# Allegro board eem2ttl.brd
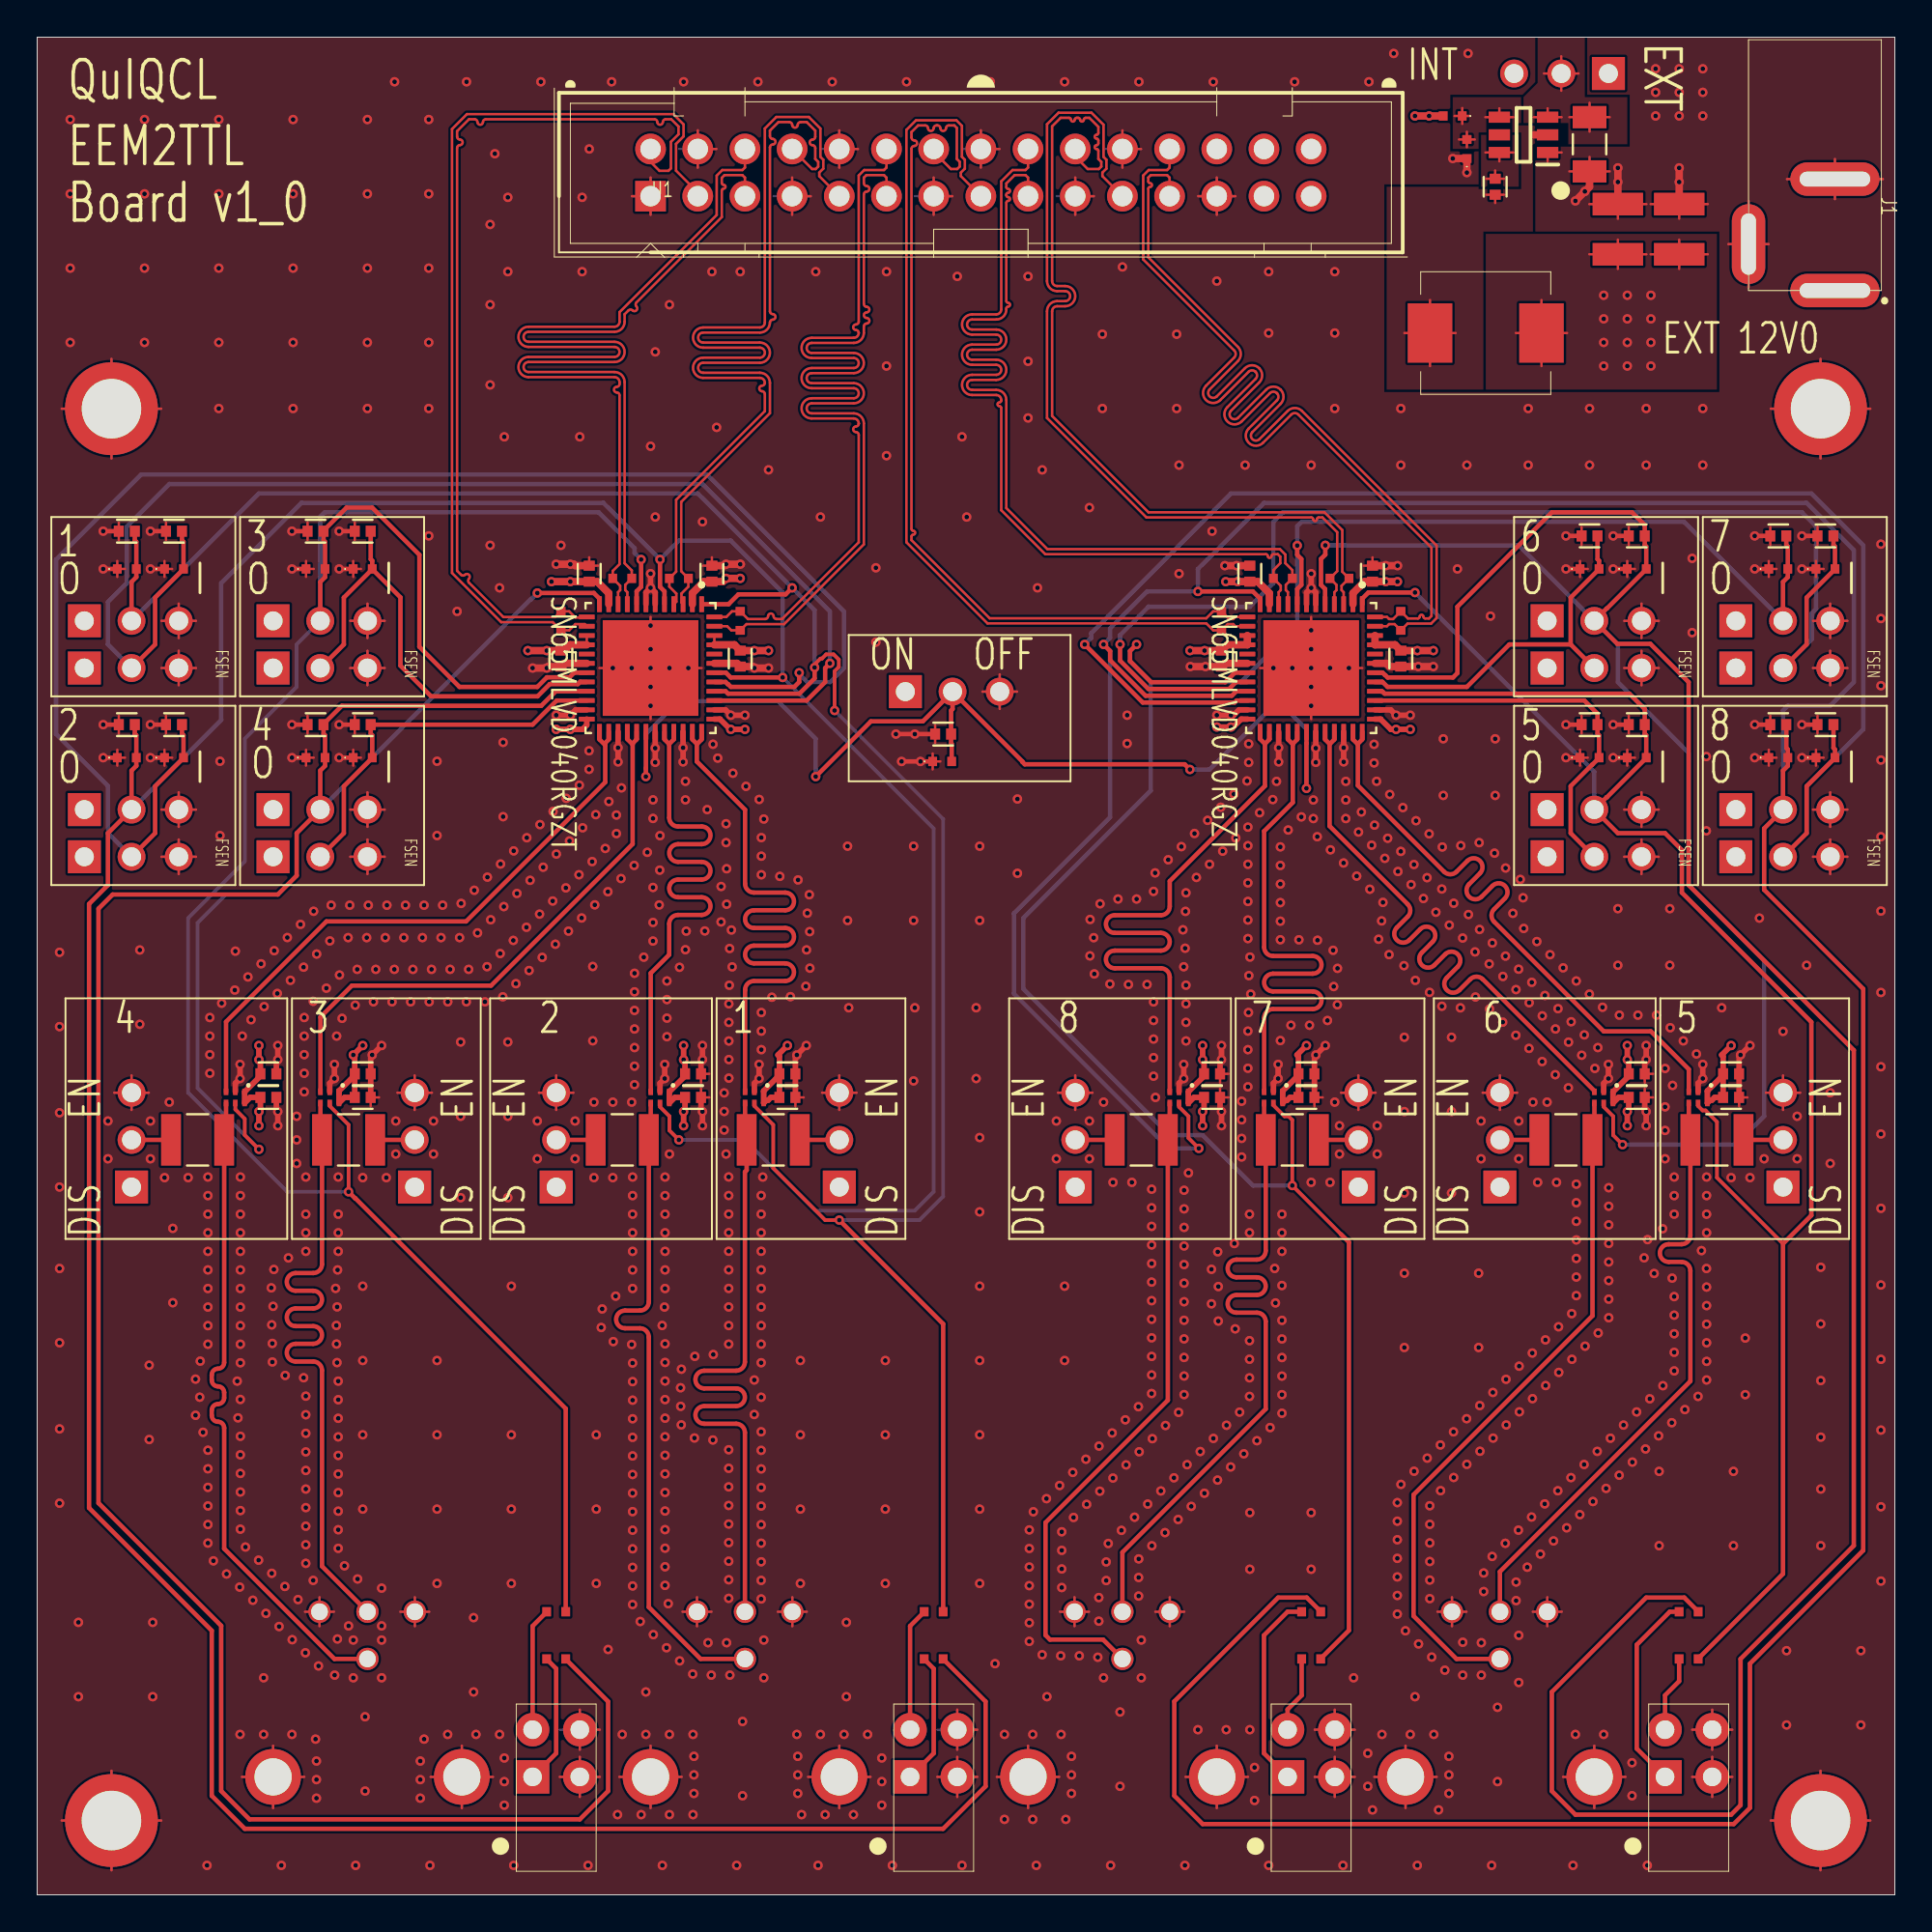
[diagram p0: board, top side]
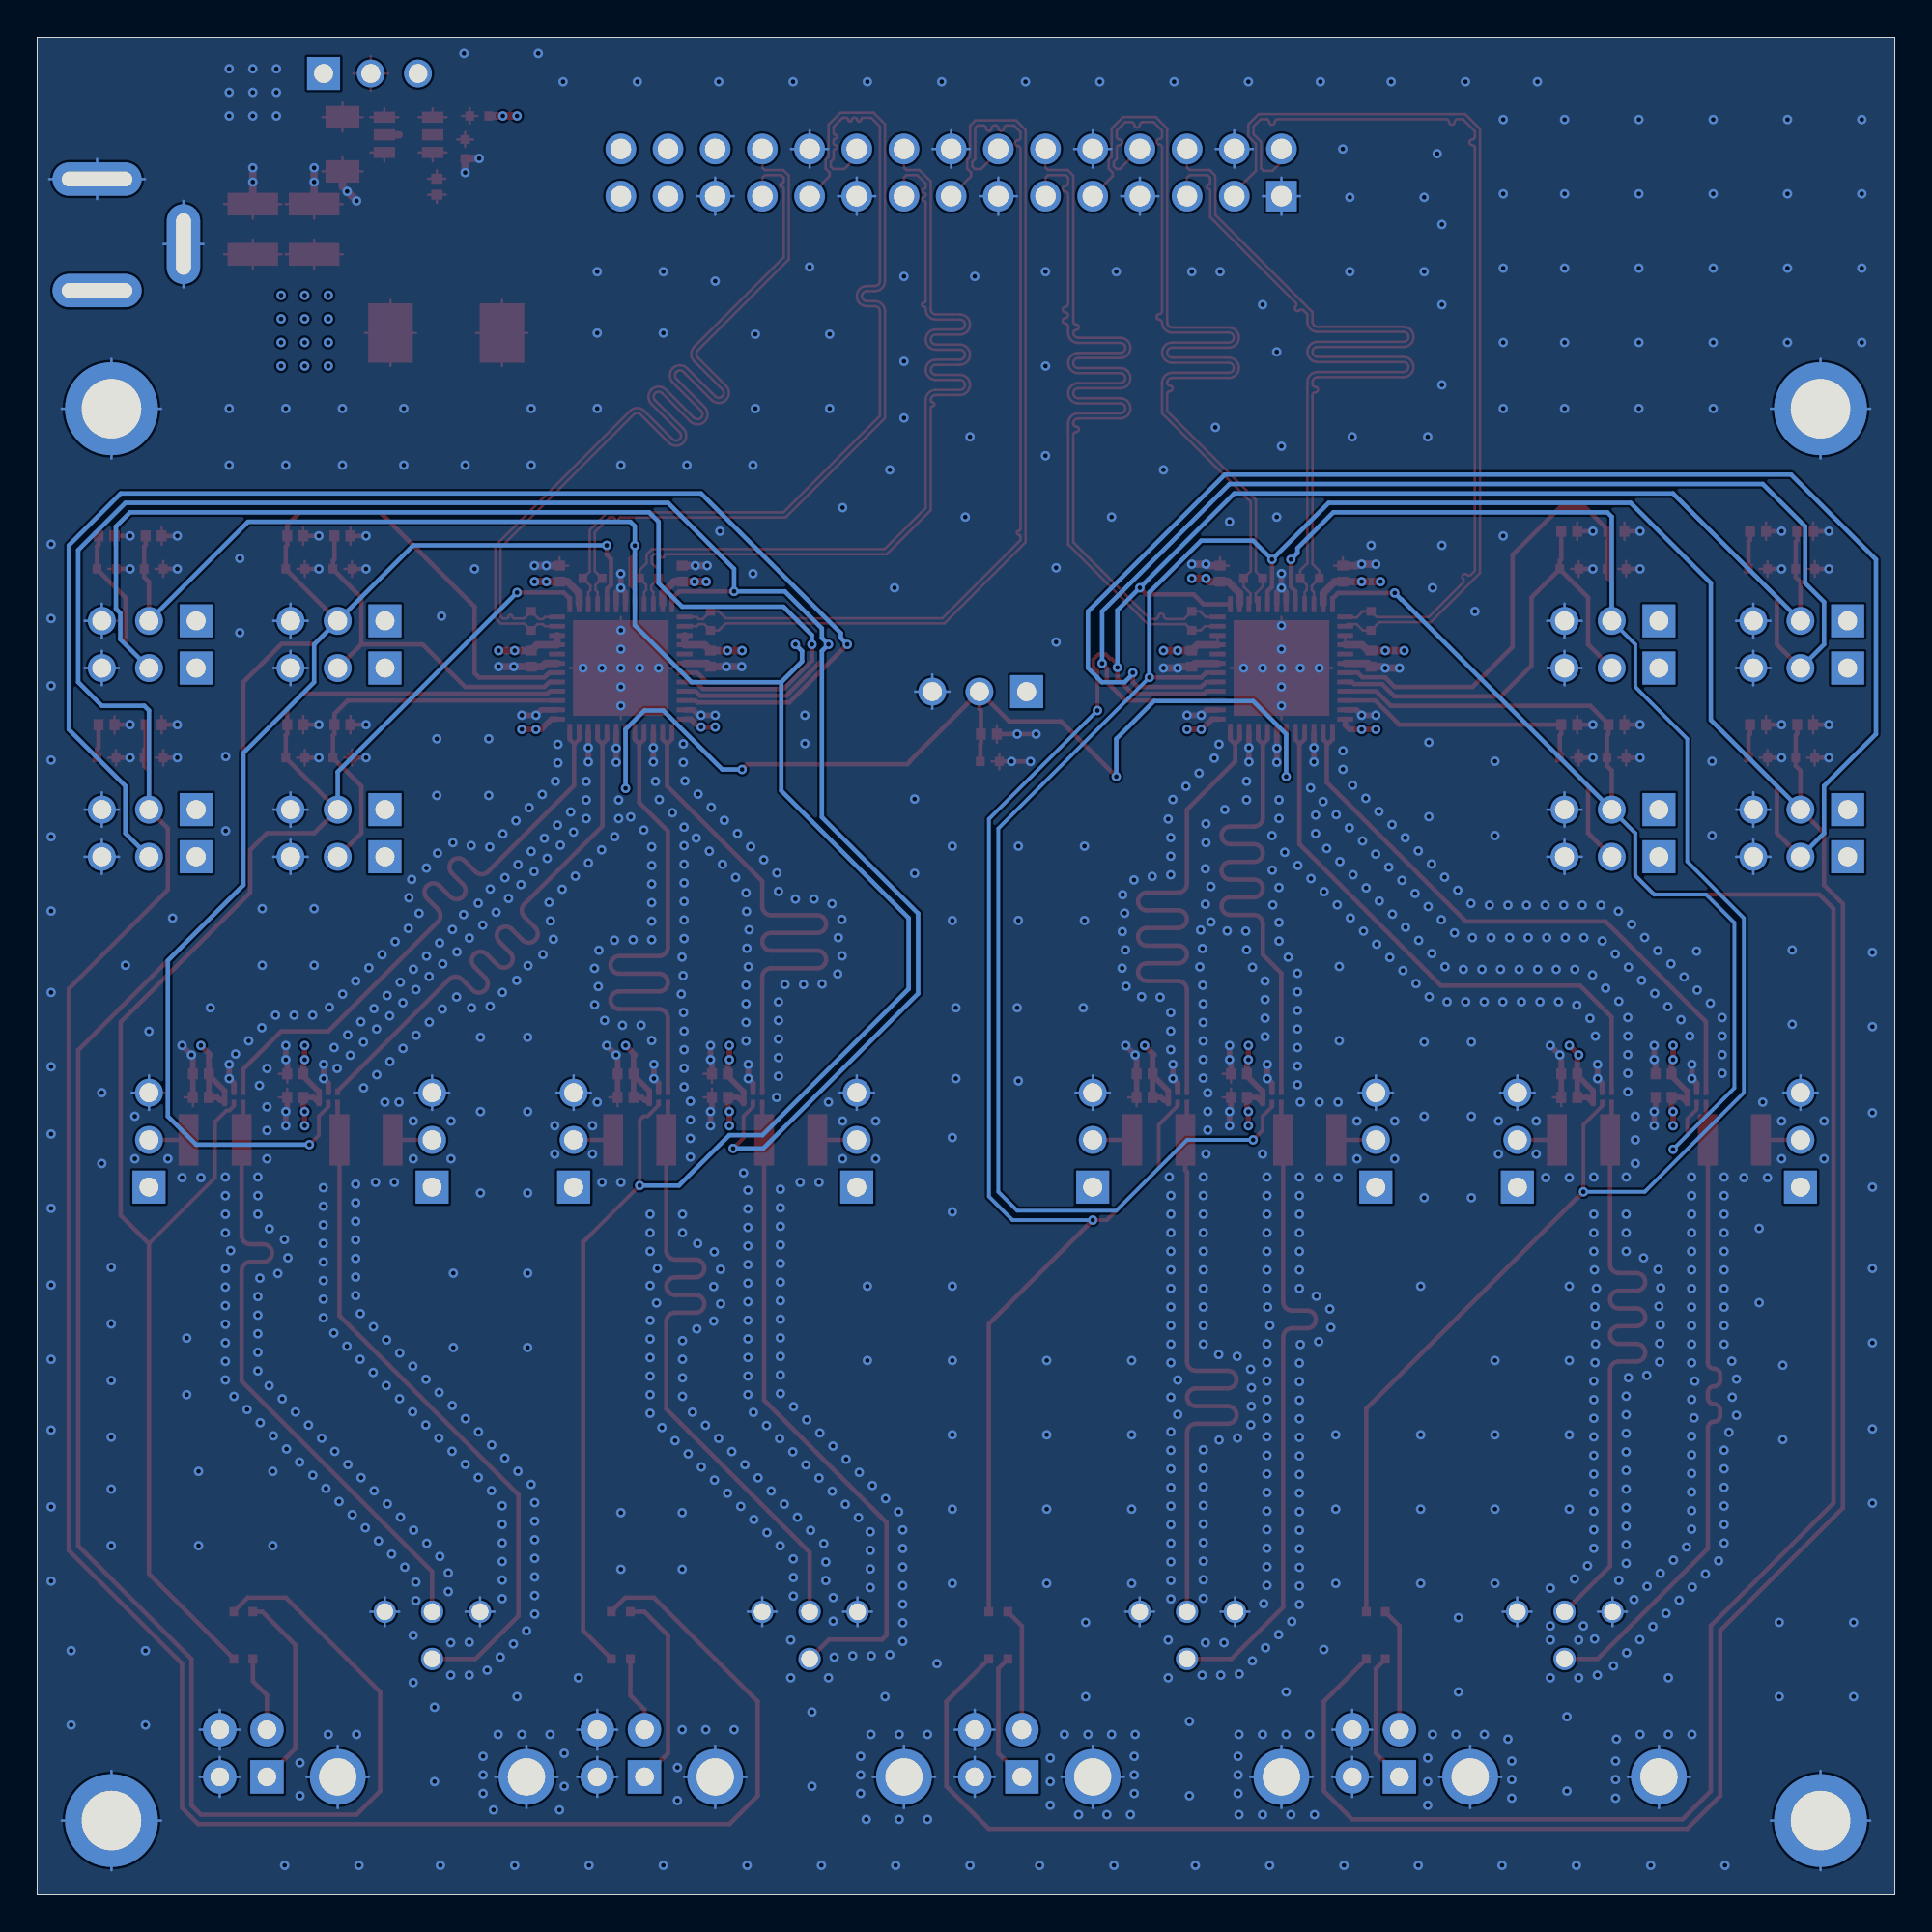
[diagram p1: board, bottom side, seen from below]

Outline 100 x 100 mm; copper layers: TOP, L1, L2, BOTTOM. Coordinates in mm from the lower left corner of the outline.
Outline path: 0,100 100,100 100,0 0,0 0,100

## Design rules (mm)
constraint set DEFAULT: min track width 0.127
net group LVDS: nets LVDS1_N LVDS1_P LVDS2_N LVDS2_P LVDS3_N LVDS3_P LVDS4_N LVDS4_P LVDS5_N LVDS5_P LVDS6_N LVDS6_P LVDS7_N LVDS7_P LVDS8_N LVDS8_P
net group SINGLE1: nets BUFFER_IN1 BUFFER_IN2 BUFFER_IN3 BUFFER_IN4 BUFFER_IN5 BUFFER_IN6 BUFFER_IN7 BUFFER_IN8
net group SINGLE2: nets BUFFER_OUT1 BUFFER_OUT2 BUFFER_OUT3 BUFFER_OUT4 BUFFER_OUT5 BUFFER_OUT6 BUFFER_OUT7 BUFFER_OUT8

## Placement (name value [footprint] x y rotation side)
C1  100nF  [CAPC1005X55N]  48.77 62.48 0 top
C2  100nF  [CAPC1005X55N]  78.49 91.95 90 top
C3  10uF  [CAPC3216X180N]  83.57 94.23 270 top
C4  22uF  [CAPC3225X270N]  85.09 89.66 270 top
C5  22uF  [CAPC3225X270N]  88.39 89.66 270 top
C6  100nF  [CAPC1005X55N]  12.45 44.2 180 top
C7  100nF  [CAPC1005X55N]  12.45 42.93 180 top
C8  100nF  [CAPC1005X55N]  17.53 44.2 180 top
C9  100nF  [CAPC1005X55N]  17.53 42.93 180 top
C10  100nF  [CAPC1005X55N]  35.31 44.2 180 top
C11  100nF  [CAPC1005X55N]  35.31 42.93 180 top
C12  100nF  [CAPC1005X55N]  40.39 44.2 180 top
C13  100nF  [CAPC1005X55N]  40.39 42.93 180 top
C14  100nF  [CAPC1005X55N]  63.25 44.2 180 top
C15  100nF  [CAPC1005X55N]  63.25 42.93 180 top
C16  100nF  [CAPC1005X55N]  68.33 42.93 180 top
C17  100nF  [CAPC1005X55N]  68.33 44.2 180 top
C18  100nF  [CAPC1005X55N]  86.11 44.2 180 top
C19  100nF  [CAPC1005X55N]  86.11 42.93 180 top
C20  100nF  [CAPC1005X55N]  91.19 44.2 180 top
C21  100nF  [CAPC1005X55N]  91.19 42.93 180 top
C22  100nF  [CAPC1005X55N]  4.83 73.41 0 top
C23  100nF  [CAPC1005X55N]  7.37 73.41 0 top
C24  100nF  [CAPC1005X55N]  37.85 66.55 90 top
C25  100nF  [CAPC1005X55N]  36.32 71.12 270 top
C26  100nF  [CAPC1005X55N]  29.72 71.12 270 top
C27  100nF  [CAPC1005X55N]  28.19 66.55 90 top
C28  100nF  [CAPC1005X55N]  4.83 62.99 0 top
C29  100nF  [CAPC1005X55N]  7.37 62.99 0 top
C30  100nF  [CAPC1005X55N]  14.99 73.41 0 top
C31  100nF  [CAPC1005X55N]  17.53 73.41 0 top
C32  100nF  [CAPC1005X55N]  14.99 62.99 0 top
C33  100nF  [CAPC1005X55N]  17.53 62.99 0 top
C34  100nF  [CAPC1005X55N]  73.41 66.55 90 top
C35  100nF  [CAPC1005X55N]  71.88 71.12 270 top
C36  100nF  [CAPC1005X55N]  65.28 71.12 270 top
C37  100nF  [CAPC1005X55N]  63.75 66.55 90 top
C38  100nF  [CAPC1005X55N]  86.11 62.99 0 top
C39  100nF  [CAPC1005X55N]  83.57 62.99 0 top
C40  100nF  [CAPC1005X55N]  86.11 73.15 0 top
C41  100nF  [CAPC1005X55N]  83.57 73.15 0 top
C42  100nF  [CAPC1005X55N]  93.73 73.15 0 top
C43  100nF  [CAPC1005X55N]  96.27 73.15 0 top
C44  100nF  [CAPC1005X55N]  93.73 62.99 0 top
C45  100nF  [CAPC1005X55N]  96.27 62.99 0 top
J1  DC-005-20A  [DC00520A]  96.77 86.36 270 top
M1  -  [M3MECHHOLE]  4 4 0 top
M2  -  [M3MECHHOLE]  96 4 0 top
M3  -  [M3MECHHOLE]  4 80 0 top
M4  -  [M3MECHHOLE]  96 80 0 top
PS1  AP62201WU-7  [SOT95P280X100-6N]  80.01 94.74 180 top
R1  100  [RES_ERJ2RKF1000X]  68.58 15.24 0 top
R2  100  [RES_ERJ2RKF1000X]  68.58 12.7 0 top
R3  100  [RES_ERJ2RKF1000X]  88.9 15.24 0 top
R4  100  [RES_ERJ2RKF1000X]  88.9 12.7 0 top
R5  100  [RES_ERJ2RKF1000X]  27.94 12.7 0 top
R6  100  [RES_ERJ2RKF1000X]  27.94 15.24 0 top
R7  100  [RES_ERJ2RKF1000X]  48.26 12.7 0 top
R8  100  [RES_ERJ2RKF1000X]  48.26 15.24 0 top
R9  10k  [ERJ2RKD1004X]  48.72 61.01 0 top
R10  31k6  [ERJ2RKD1004X]  76.2 95.76 180 top
R11  10k  [ERJ2RKD1004X]  76.96 93.98 90 top
R12  49R9  [RESC3126X65N]  39.62 40.64 180 top
R13  49R9  [RESC3126X65N]  31.5 40.64 0 top
R14  49R9  [RESC3126X65N]  16.76 40.64 180 top
R15  49R9  [RESC3126X65N]  8.64 40.64 0 top
R16  49R9  [RESC3126X65N]  90.42 40.64 180 top
R17  49R9  [RESC3126X65N]  82.3 40.64 0 top
R18  49R9  [RESC3126X65N]  67.56 40.64 180 top
R19  49R9  [RESC3126X65N]  59.44 40.64 0 top
R20  10k  [ERJ2RKD1004X]  4.83 71.37 0 top
R21  10k  [ERJ2RKD1004X]  7.37 71.37 0 top
R22  100.0R  [RES_ERJ2RKF1000X]  28.19 68.58 270 top
R23  100.0R  [RES_ERJ2RKF1000X]  31.5 70.87 180 top
R24  100.0R  [RES_ERJ2RKF1000X]  34.54 70.87 180 top
R25  100.0R  [RES_ERJ2RKF1000X]  37.85 68.58 90 top
R26  10k  [ERJ2RKD1004X]  4.83 61.21 0 top
R27  10k  [ERJ2RKD1004X]  7.37 61.21 0 top
R28  10k  [ERJ2RKD1004X]  14.99 71.37 0 top
R29  10k  [ERJ2RKD1004X]  17.53 71.37 0 top
R30  10k  [ERJ2RKD1004X]  14.99 61.21 0 top
R31  10k  [ERJ2RKD1004X]  17.53 61.21 0 top
R32  100.0R  [RES_ERJ2RKF1000X]  63.75 68.58 270 top
R33  100.0R  [RES_ERJ2RKF1000X]  67.06 70.87 180 top
R34  100.0R  [RES_ERJ2RKF1000X]  70.1 70.87 180 top
R35  100.0R  [RES_ERJ2RKF1000X]  73.41 68.58 90 top
R36  10k  [ERJ2RKD1004X]  86.11 61.21 0 top
R37  10k  [ERJ2RKD1004X]  83.57 61.21 0 top
R38  10k  [ERJ2RKD1004X]  86.11 71.37 0 top
R39  10k  [ERJ2RKD1004X]  83.57 71.37 0 top
R40  10k  [ERJ2RKD1004X]  93.73 71.37 0 top
R41  10k  [ERJ2RKD1004X]  96.27 71.37 0 top
R42  10k  [ERJ2RKD1004X]  93.73 61.21 0 top
R43  10k  [ERJ2RKD1004X]  96.27 61.21 0 top
U1  -  [N2530-6002-RB_3M]  33.02 91.44 0 top
U2  -  [LH32K039F]  68.58 7.62 0 top
U3  -  [LH32K039F]  88.9 7.62 0 top
U4  -  [LH32K039F]  27.94 7.62 0 top
U5  -  [LH32K039F]  48.26 7.62 0 top
U6  -  [DOSIN-801-0093]  38.1 12.7 180 top
U7  -  [DOSIN-801-0093]  17.78 12.7 180 top
U8  -  [DOSIN-801-0093]  78.74 12.7 180 top
U9  -  [PIN3BOOMELE]  82.04 98.04 180 top
U10  -  [DOSIN-801-0093]  58.42 12.7 180 top
U11  -  [PIN3BOOMELE]  49.28 64.77 0 top
U12  3.3uH  [MWSA0603S-3R3MT]  77.98 84.07 0 top
U13  -  [SN74LXC1T45DRYR]  38.61 42.93 180 top
U14  -  [SN74LXC1T45DRYR]  33.53 42.93 180 top
U15  -  [SN74LXC1T45DRYR]  15.75 42.93 180 top
U16  -  [SN74LXC1T45DRYR]  10.67 42.93 180 top
U17  -  [SN74LXC1T45DRYR]  89.41 42.93 180 top
U18  -  [SN74LXC1T45DRYR]  84.33 42.93 180 top
U19  -  [SN74LXC1T45DRYR]  66.55 42.93 180 top
U20  -  [SN74LXC1T45DRYR]  61.47 42.93 180 top
U21  -  [PIN3BOOMELE]  5.08 68.58 0 top
U22  -  [PIN3BOOMELE]  5.08 66.04 0 top
U23  -  [PIN3BOOMELE]  43.18 40.64 90 top
U24  SN65MLVD040RGZ  [QFN50P700X700X100-49N]  33.02 66.04 270 top
U25  -  [PIN3BOOMELE]  5.08 58.42 0 top
U26  -  [PIN3BOOMELE]  5.08 55.88 0 top
U27  -  [PIN3BOOMELE]  27.94 40.64 90 top
U28  -  [PIN3BOOMELE]  15.24 68.58 0 top
U29  -  [PIN3BOOMELE]  15.24 66.04 0 top
U30  -  [PIN3BOOMELE]  20.32 40.64 90 top
U31  -  [PIN3BOOMELE]  15.24 58.42 0 top
U32  -  [PIN3BOOMELE]  15.24 55.88 0 top
U33  -  [PIN3BOOMELE]  5.08 40.64 90 top
U34  SN65MLVD040RGZ  [QFN50P700X700X100-49N]  68.58 66.04 270 top
U35  -  [PIN3BOOMELE]  83.82 58.42 0 top
U36  -  [PIN3BOOMELE]  83.82 55.88 0 top
U37  -  [PIN3BOOMELE]  93.98 40.64 90 top
U38  -  [PIN3BOOMELE]  83.82 68.58 0 top
U39  -  [PIN3BOOMELE]  83.82 66.04 0 top
U40  -  [PIN3BOOMELE]  78.74 40.64 90 top
U41  -  [PIN3BOOMELE]  93.98 68.58 0 top
U42  -  [PIN3BOOMELE]  93.98 66.04 0 top
U43  -  [PIN3BOOMELE]  71.12 40.64 90 top
U44  -  [PIN3BOOMELE]  93.98 58.42 0 top
U45  -  [PIN3BOOMELE]  93.98 55.88 0 top
U46  -  [PIN3BOOMELE]  55.88 40.64 90 top

## Library data of the parts
C1 C2 C6-C45 = TMK105BJ104KV-F
C3 = CL31A106KBHNNNE
C4 C5 = TMK325BJ226MM-T
J1 = DC-005-20A
M1-M4 = M3MECHHOLE
PS1 = AP62201WU-7
R1-R8 R22-R25 R32-R35 = ERJ2RKF1000X
R9 R11 R20 R21 R26-R31 R36-R43 = ERJ2RKF1002X_0
R10 = ERJ-2RKF3162X_0
R12-R19 = AC1210FR-0749R9L
U1 = N2530-6002-RB_3M
U2-U5 = LH32K039F
U6-U8 U10 = DOSIN-801-0093
U9 U11 U21-U23 U25-U33 U35-U46 = PIN3BOOMELE
U12 = MWSA0603S-3R3MT
U13-U20 = SN74LXC1T45DRYR
U24 U34 = SN65MLVD040RGZT

## Footprints (pads in the part's own frame, mm; a bottom-side part is the same pattern mirrored in y, then rotated)
CAPC1005X55N
  rect 0.54x0.6 smd: 1(-0.43,0) 2(0.43,0)
CAPC3216X180N
  rect 1.2x1.82 smd: 1(-1.46,0) 2(1.46,0)
CAPC3225X270N
  rect 1.22x2.72 smd: 1(-1.35,0) 2(1.35,0)
DC00520A
  rrect 1.8x4.8 hole 0.8x3.8: 1(0,0) 2(-6,0)
  rrect 4.3x1.8 hole 3.3x0.8: 3(-2.5,-4.65)
DOSIN-801-0093
  round 1.2 hole 0.9: 1(-2.55,-2.54) 2(0,-2.54) 3(2.58,-2.54) 4(0,0)
  round 3 hole 2: 5(-5.08,6.35) 6(5.08,6.35)
ERJ2RKD1004X
  rect 0.475x0.5 smd: 1(-0.512,0) 2(0.512,0)
LH32K039F
  rect 1.8x1.8 hole 1: 1(-1.27,-1.27)
  round 1.8 hole 1: 2(1.27,-1.27) 3(-1.27,1.27) 4(1.27,1.27)
M3MECHHOLE
  round 5 hole 3.2: 1(0,0)
MWSA0603S-3R3MT
  rect 2.4x3.2 smd: 1(-3,0) 2(3,0)
N2530-6002-RB_3M
  rect 1.651x1.651 hole 1.1: 1(0,0)
  round 1.651 hole 1.1: 2(0,2.54) 3(2.54,0) 4(2.54,2.54) 5(5.08,0) 6(5.08,2.54) 7(7.62,0) 8(7.62,2.54) 9(10.16,0) 10(10.16,2.54) 11(12.7,0) 12(12.7,2.54) 13(15.24,0) 14(15.24,2.54) 15(17.78,0) 16(17.78,2.54) 17(20.32,0) 18(20.32,2.54) 19(22.86,0) 20(22.86,2.54) 21(25.4,0) 22(25.4,2.54) 23(27.94,0) 24(27.94,2.54) 25(30.48,0) 26(30.48,2.54) 27(33.02,0) 28(33.02,2.54) 29(35.56,0) 30(35.56,2.54)
PIN3BOOMELE
  rect 1.778x1.778 hole 1.02: 1(-2.54,0)
  round 1.5 hole 1.02: 2(0,0) 3(2.54,0)
QFN50P700X700X100-49N
  custom 0.86x0.26 smd: 1(-3.435,2.75) 2(-3.435,2.25) 3(-3.435,1.75) 4(-3.435,1.25) 5(-3.435,0.75) 6(-3.435,0.25) 7(-3.435,-0.25) 8(-3.435,-0.75) 9(-3.435,-1.25) 10(-3.435,-1.75) 11(-3.435,-2.25) 12(-3.435,-2.75) 25(3.435,-2.75) 26(3.435,-2.25) 27(3.435,-1.75) 28(3.435,-1.25) 29(3.435,-0.75) 30(3.435,-0.25) 31(3.435,0.25) 32(3.435,0.75) 33(3.435,1.25) 34(3.435,1.75) 35(3.435,2.25) 36(3.435,2.75)
  custom 0.26x0.86 smd: 13(-2.75,-3.435) 14(-2.25,-3.435) 15(-1.75,-3.435) 16(-1.25,-3.435) 17(-0.75,-3.435) 18(-0.25,-3.435) 19(0.25,-3.435) 20(0.75,-3.435) 21(1.25,-3.435) 22(1.75,-3.435) 23(2.25,-3.435) 24(2.75,-3.435) 37(2.75,3.435) 38(2.25,3.435) 39(1.75,3.435) 40(1.25,3.435) 41(0.75,3.435) 42(0.25,3.435) 43(-0.25,3.435) 44(-0.75,3.435) 45(-1.25,3.435) 46(-1.75,3.435) 47(-2.25,3.435) 48(-2.75,3.435)
  rect 5.15x5.15 smd: 49(0,0)
RES_ERJ2RKF1000X
  rect 0.475x0.5 smd: 1(-0.512,0) 2(0.512,0)
RESC3126X65N
  rect 1.07x2.77 smd: 1(-1.43,0) 2(1.43,0)
SN74LXC1T45DRYR
  rect 0.25x0.35 smd: 1(-0.5,-0.3) 2(0,-0.3) 3(0.5,-0.3) 4(0.5,0.3) 5(0,0.3) 6(-0.5,0.3)
SOT95P280X100-6N
  rect 1.15x0.6 smd: 1(-1.3,0.95) 2(-1.3,0) 3(-1.3,-0.95) 4(1.3,-0.95) 5(1.3,0) 6(1.3,0.95)

## Nets
3V3: C4.2 C5.2 C6.2 C7.2 C8.2 C9.2 C10.2 C11.2 C12.2 C13.2 C14.2 C15.2 C16.2 C17.2 C18.2 C19.2 C20.2 C21.2 C24.2 C25.2 C26.2 C27.2 C34.2 C35.2 C36.2 C37.2 R10.2 U11.1 U12.2 U13.1 U13.6(VCCB) U14.1 U14.6(VCCB) U15.1 U15.6(VCCB) U16.1 U16.6(VCCB) U17.1 U17.6(VCCB) U18.1 U18.6(VCCB) U19.1 U19.6(VCCB) U20.1 U20.6(VCCB) U21.1 U22.1 U24.2 U24.11 U24.15 U24.16 U24.24 U24.37 U24.45 U24.46(VCC#46) U25.1 U26.1 U28.1 U29.1 U31.1 U32.1 U34.2 U34.11 U34.15 U34.16 U34.24 U34.37 U34.45 U34.46(VCC#46) U35.1 U36.1 U38.1 U39.1 U41.1 U42.1 U44.1 U45.1
12V0: C3.1 PS1.3(VIN) U9.2
12V0EEM: U1.28 U1.29 U9.3
12V0EXT: J1.1 U9.1
GND: C1.1 C3.2 C4.1 C5.1 C6.1 C7.1 C8.1 C9.1 C10.1 C11.1 C12.1 C13.1 C14.1 C15.1 C16.1 C17.1 C18.1 C19.1 C20.1 C21.1 C22.1 C23.1 C24.1 C25.1 C26.1 C27.1 C28.1 C29.1 C30.1 C31.1 C32.1 C33.1 C34.1 C35.1 C36.1 C37.1 C38.1 C39.1 C40.1 C41.1 C42.1 C43.1 C44.1 C45.1 J1.2 J1.3 M1.1(GND) M2.1(GND) M3.1(GND) M4.1(GND) PS1.1 R9.1 R11.1 R20.1 R21.1 R26.1 R27.1 R28.1 R29.1 R30.1 R31.1 R36.1 R37.1 R38.1 R39.1 R40.1 R41.1 R42.1 R43.1 U1.1 U1.4 U1.7 U1.10 U1.13 U1.16 U1.19 U1.22 U1.25 U2.2 U2.4 U3.2 U3.4 U4.2 U4.4 U5.2 U5.4 U6.1 U6.3 U6.5 U6.6 U7.1 U7.3 U7.5 U7.6 U8.1 U8.3 U8.5 U8.6 U10.1 U10.3 U10.5 U10.6 U11.3 U13.2 U14.2 U15.2 U16.2 U17.2 U18.2 U19.2 U20.2 U21.3 U22.3 U23.3 U24.6 U24.7 U24.18 U24.23 U24.27 U24.31 U24.34 U24.38 U24.43 U24.49 U25.3 U26.3 U27.3 U28.3 U29.3 U30.3 U31.3 U32.3 U33.3 U34.6 U34.7 U34.18 U34.23 U34.27 U34.31 U34.34 U34.38 U34.43 U34.49 U35.3 U36.3 U37.3 U38.3 U39.3 U40.3 U41.3 U42.3 U43.3 U44.3 U45.3 U46.3
BUFFER_IN1: U13.3 U24.35 U24.36
BUFFER_IN2: U14.3 U24.32 U24.33
BUFFER_IN3: U15.3 U24.28 U24.29
BUFFER_IN4: U16.3 U24.25 U24.26
BUFFER_IN5: U17.3 U34.35 U34.36
BUFFER_IN6: U18.3 U34.32 U34.33
BUFFER_IN7: U19.3 U34.28 U34.29
BUFFER_IN8: U20.3 U34.25 U34.26
BUFFER_OUT1: R12.2 U6.2(SIG_UP) U13.4
BUFFER_OUT2: R13.2 U6.4 U14.4
BUFFER_OUT3: R14.2 U7.2(SIG_UP) U15.4
BUFFER_OUT4: R15.2 U7.4 U16.4
BUFFER_OUT5: R16.2 U8.2(SIG_UP) U17.4
BUFFER_OUT6: R17.2 U8.4 U18.4
BUFFER_OUT7: R18.2 U10.2(SIG_UP) U19.4
BUFFER_OUT8: R19.2 U10.4 U20.4
DIR1: C22.2 R8.2 R20.2 U13.5 U21.2 U24.1 U24.40
DIR2: C28.2 R7.2 R26.2 U14.5 U24.5 U24.42 U25.2
DIR3: C30.2 R6.2 R28.2 U15.5 U24.8 U24.19 U28.2
DIR4: C32.2 R5.2 R30.2 U16.5 U24.12 U24.21 U31.2
DIR5: C38.2 R4.2 R36.2 U17.5 U34.1 U34.40 U35.2
DIR6: C40.2 R3.2 R38.2 U18.5 U34.5 U34.42 U38.2
DIR7: C42.2 R2.2 R40.2 U19.5 U34.8 U34.19 U41.2
DIR8: C44.2 R1.2 R42.2 U20.5 U34.12 U34.21 U44.2
FSEN1: C23.2 R21.2 U22.2 U24.39
FSEN2: C29.2 R27.2 U24.41 U26.2
FSEN3: C31.2 R29.2 U24.20 U29.2
FSEN4: C33.2 R31.2 U24.22 U32.2
FSEN5: C39.2 R37.2 U34.39 U36.2
FSEN6: C41.2 R39.2 U34.41 U39.2
FSEN7: C43.2 R41.2 U34.20 U42.2
FSEN8: C45.2 R43.2 U34.22 U45.2
LVDS1_N: R25.2 U1.12 U24.48
LVDS1_P: R25.1 U1.11 U24.47
LVDS2_N: R24.2 U1.9 U24.4
LVDS2_P: R24.1 U1.8 U24.3
LVDS3_N: R23.2 U1.6 U24.10
LVDS3_P: R23.1 U1.5 U24.9
LVDS4_N: R22.2 U1.3 U24.14
LVDS4_P: R22.1 U1.2 U24.13
LVDS5_N: R35.2 U1.24 U34.48
LVDS5_P: R35.1 U1.23 U34.47
LVDS6_N: R34.2 U1.21 U34.4
LVDS6_P: R34.1 U1.20 U34.3
LVDS7_N: R33.2 U1.18 U34.10
LVDS7_P: R33.1 U1.17 U34.9
LVDS8_N: R32.2 U1.15 U34.14
LVDS8_P: R32.1 U1.14 U34.13
TERM1: R12.1 U23.2
TERM2: R13.1 U27.2
TERM3: R14.1 U30.2
TERM4: R15.1 U33.2
TERM5: R16.1 U37.2
TERM6: R17.1 U40.2
TERM7: R18.1 U43.2
TERM8: R19.1 U46.2
N208059: C2.1 PS1.2 U12.1
N208159: C2.2 PS1.6
N208207: PS1.4 R10.1 R11.2
N212931: C1.2 R9.2 U11.2 U24.30 U34.30
N230596: R1.1 U2.1
N230600: R2.1 U2.3
N230742: R3.1 U3.1
N230746: R4.1 U3.3
N230890: R5.1 U4.1
N230894: R6.1 U4.3
N231040: R7.1 U5.1
N231044: R8.1 U5.3

Pads without a net: PS1 5; U1 26 27 30; U23 1; U24 17 44; U27 1; U30 1; U33 1; U34 17 44; U37 1; U40 1; U43 1; U46 1

## Via types
v1: diameter 0.508, hole 0.254, TOP to BOTTOM, 1467 vias

## Routing (per net, layer and track width the routed paths; a pad name or vN(x,y) marks a point on that pad's centre or on a via; arc(x,y) is an arc through that point)
3V3: length 173.7
  TOP w0.127: 88.39,87.52 C5.2 ; C5.2 86.85,88.31 ; C5.2 89.93,88.31 ; C5.2 88.39,89.1 ; C4.2 86.63,88.31 ; C4.2 85.09,87.52 ; C4.2 83.55,88.31 ; C4.2 85.09,89.1 ; 80.98,82.3 U12.2 ; U12.2 79.6,84.07 ; U12.2 80.98,85.85 ; U12.2 82.36,84.07 ; U24.46 U24.45 ; 29.59,67.79 29.59,67.29
  TOP w0.3: v1(40.39,45.72) 39.88,45.21 39.96,45.13 C12.2 39.96,44.12 ; v1(34.8,41.4) v1(34.8,42.16) 34.88,42.24 C11.2 34.33,42.93 U14.6 U14.1 34.88,44.07 C10.2 34.88,44.88 v1(34.8,44.96) v1(34.8,45.72) ; v1(63.5,62.87) v1(64.26,62.87) 64.39,62.87 64.81,63.29 U34.24 ; v1(62.74,41.4) v1(62.74,42.16) 62.82,42.24 C15.2 62.27,42.93 U20.6 U20.1 62.82,44.07 C14.2 62.82,44.88 v1(62.74,44.96) v1(62.74,45.72) ; U24.37 36.76,63.29 37.31,62.74 v1(37.34,62.74) v1(38.1,62.74) ; v1(11.94,41.4) v1(11.94,42.16) 12.02,42.24 C7.2 11.47,42.93 U16.6 U16.1 12.02,44.07 C6.2 12.02,44.88 v1(11.94,44.96) v1(11.94,45.72) ; v1(73.91,62.74) v1(73.15,62.74) 72.87,62.74 72.31,63.29 U34.37 ; 29.59,63.29 29.59,62.97 29.35,62.74 v1(28.7,62.74) v1(27.94,62.74) ; 67.9,44.12 67.05,43.28 U19.1 U19.6 67.2,42.77 67.29,42.77 67.44,42.93 C16.2 67.9,44.12 ; 67.9,44.12 C17.2 67.9,45.13 67.82,45.21 v1(68.33,45.72) ; 90.76,44.12 89.91,43.28 U17.1 U17.6 90.06,42.77 90.15,42.77 90.3,42.93 C21.2 90.76,44.12 ; 90.76,44.12 C20.2 90.76,45.13 90.68,45.21 v1(91.19,45.72) ; 39.96,44.12 39.11,43.28 U13.1 U13.6 39.26,42.77 39.35,42.77 39.5,42.93 C13.2 39.96,44.12 ; v1(85.6,41.4) v1(85.6,42.16) 85.68,42.24 C19.2 85.13,42.93 U18.6 U18.1 85.68,44.07 C18.2 85.68,44.88 v1(85.6,44.96) v1(85.6,45.72) ; v1(17.53,45.72) v1(17.02,45.21) 17.1,45.13 C8.2 17.1,44.12 ; 17.1,44.12 16.25,43.28 U15.1 U15.6 16.55,42.93 C9.2 17.1,44.12
  TOP w0.4: v1(27.69,70.69) v1(28.7,70.69) C26.2 30.15,70.69 30.77,70.07 U24.11 ; U34.11 66.33,70.07 65.71,70.69 C36.2 v1(64.62,70.69) v1(63.98,70.69) ; U24.45 37.53,67.29 C24.2 v1(38.61,66.98) v1(39.37,66.98) ; 29.59,67.29 28.68,67.29 28.37,66.98 C27.2 v1(27.43,66.98) v1(26.42,66.98) ; U34.15 U34.16 64.07,67.29 C37.2 v1(62.84,66.98) v1(62.05,66.98) ; v1(73.23,70.69) v1(72.59,70.69) C35.2 71.45,70.69 70.83,70.07 U34.2 ; U34.46 U34.45 73.09,67.29 C34.2 v1(74.3,66.98) v1(75.16,66.98) ; R10.2 v1(74.93,95.76) v1(74.17,95.76) ; U24.2 35.27,70.07 35.89,70.69 C25.2 36.91,70.69 v1(37.08,70.87) v1(37.85,70.87)
  L2 w0.127: U38.1 82.35,68.58 ; U38.1 80.21,68.58 ; U38.1 81.28,69.65 ; U38.1 81.28,67.51 ; U11.1 46.74,65.84 ; U11.1 47.8,64.77 ; U11.1 46.74,63.7 ; U11.1 45.67,64.77 ; 81.28,54.81 U36.1 ; U36.1 82.35,55.88 ; U36.1 80.21,55.88 ; U36.1 81.28,56.95 ; 90.37,55.88 U45.1 ; U45.1 92.51,55.88 ; U45.1 91.44,56.95 ; U45.1 91.44,54.81 ; 81.28,64.97 U39.1 ; U39.1 82.35,66.04 ; U39.1 81.28,67.11 ; U39.1 80.21,66.04 ; U32.1 13.77,55.88 ; U32.1 12.7,56.95 ; U32.1 12.7,54.81 ; U32.1 11.63,55.88 ; 11.63,66.04 U29.1 ; U29.1 12.7,67.11 ; U29.1 13.77,66.04 ; U29.1 12.7,64.97 ; 11.63,68.58 U28.1 ; U28.1 12.7,67.51 ; U28.1 13.77,68.58 ; U28.1 12.7,69.65 ; U41.1 92.51,68.58 ; U41.1 91.44,69.65 ; U41.1 91.44,67.51 ; U41.1 90.37,68.58 ; U22.1 3.61,66.04 ; U22.1 2.54,67.11 ; U22.1 2.54,64.97 ; U22.1 1.47,66.04 ; 80.21,58.42 U35.1 ; U35.1 81.28,59.49 ; U35.1 81.28,57.35 ; U35.1 82.35,58.42 ; U31.1 12.7,59.49 ; U31.1 11.63,58.42 ; U31.1 12.7,57.35 ; U31.1 13.77,58.42 ; U44.1 91.44,59.49 ; U44.1 91.44,57.35 ; U44.1 92.51,58.42 ; U44.1 90.37,58.42 ; U26.1 3.61,55.88 ; U26.1 1.47,55.88 ; U26.1 2.54,54.81 ; U26.1 2.54,56.95 ; 91.44,64.97 U42.1 ; U42.1 91.44,67.11 ; U42.1 90.37,66.04 ; U42.1 92.51,66.04 ; U25.1 2.54,59.49 ; U25.1 1.47,58.42 ; U25.1 3.61,58.42 ; U25.1 2.54,57.35 ; U21.1 2.54,69.65 ; U21.1 1.47,68.58 ; U21.1 2.54,67.51 ; U21.1 3.61,68.58
  vias: v1(84.33,86.11) v1(84.33,84.84) v1(84.33,83.57) v1(84.33,82.3) v1(85.6,86.11) v1(85.6,84.84) v1(85.6,83.57) v1(85.6,82.3) v1(86.87,86.11) v1(86.87,84.84) v1(86.87,83.57) v1(86.87,82.3)
12V0: length 9.4
  TOP w0.127: C3.1 84.65,95.69 ; C3.1 83.57,96.47 ; C3.1 83.57,94.92 ; C3.1 82.48,95.69 ; PS1.3 82.06,95.69 ; PS1.3 81.31,96.17 ; PS1.3 80.56,95.69 ; 81.11,98.04 U9.2 ; U9.2 82.04,98.97 ; U9.2 82.04,97.12 ; U9.2 82.97,98.04
12V0EEM: length 11.7
  L2 w0.127: 79.5,97.12 U9.3 ; U9.3 80.43,98.04 ; U9.3 79.5,98.97 ; U9.3 78.57,98.04 ; 65.04,93.98 U1.28 ; U1.28 66.04,94.98 ; U1.28 67.04,93.98 ; U1.28 66.04,92.98 ; U1.29 69.58,91.44 ; U1.29 68.58,92.44 ; U1.29 67.58,91.44 ; U1.29 68.58,90.44
12V0EXT: length 11.6
  L2 w0.127: 96.77,85.28 J1.1 ; J1.1 94.2,86.36 ; J1.1 99.35,86.36 ; J1.1 96.77,87.44 ; 84.58,96.98 U9.1 ; U9.1 83.52,98.04 ; U9.1 85.65,98.04 ; U9.1 84.58,99.11
GND: length 1219.3
  TOP w0.127: 18.4,42.93 C9.1 17.96,42.45 ; U27.3 28.87,43.18 ; U27.3 27.94,44.11 ; U27.3 27.01,43.18 ; U27.3 27.94,42.25 ; R38.1 86.01,71.37 ; R38.1 85.59,70.95 ; R38.1 85.59,71.8 ; U11.3 52.74,64.77 ; U11.3 51.82,65.7 ; U11.3 50.89,64.77 ; U11.3 51.82,63.84 ; U1.16 50.8,94.98 ; U1.16 50.8,92.98 ; U1.16 51.8,93.98 ; U6.1 41.43,15.24 ; U6.1 40.65,16.02 ; U6.1 40.65,14.46 ; U6.1 39.87,15.24 ; R31.1 17.43,61.21 ; R31.1 17.01,60.79 ; R31.1 17.01,61.64 ; U1.19 55.88,92.44 ; U1.19 56.88,91.44 ; U1.19 55.88,90.44 ; U1.7 40.64,92.44 ; U1.7 40.64,90.44 ; U1.7 41.64,91.44 ; 48.21,60.58 R9.1 ; R9.1 48.21,61.44 ; R9.1 48.62,61.01 ; R27.1 7.27,61.21 ; R27.1 6.85,60.79 ; R27.1 6.85,61.64 ; 95.59,55.88 U45.3 ; U45.3 96.52,56.81 ; U45.3 97.45,55.88 ; U45.3 96.52,54.95 ; 19.55,15.24 U7.1 ; U7.1 21.11,15.24 ; U7.1 20.33,14.46 ; U7.1 20.33,16.02 ; 83.14,63.47 C39.1 83.14,62.51 ; 40.82,42.45 C13.1 41.26,42.93 ; 4.31,70.95 R20.1 ; R20.1 4.73,71.37 ; R20.1 4.31,71.8 ; U10.3 56.62,15.24 ; U10.3 55.84,14.46 ; U10.3 55.06,15.24 ; U10.3 55.84,16.02 ; U1.1 33.02,92.44 ; U1.1 34.02,91.44 ; U1.1 32.02,91.44 ; U1.1 33.02,90.44 ; 83.14,72.67 C41.1 83.14,73.63 ; 85.43,68.58 U38.3 ; U38.3 86.36,69.51 ; U38.3 86.36,67.65 ; U38.3 87.29,68.58 ; U41.3 97.45,68.58 ; U41.3 95.59,68.58 ; U41.3 96.52,67.65 ; U41.3 96.52,69.51 ; 4.4,73.88 C22.1 4.4,72.93 ; R26.1 4.73,61.21 ; R26.1 4.31,61.64 ; R26.1 4.31,60.79 ; 14.47,60.79 R30.1 ; R30.1 14.47,61.64 ; R30.1 14.89,61.21 ; 36.18,44.2 C10.1 35.74,43.72 ; 92.06,42.93 C21.1 91.62,42.45 ; 16.85,55.88 U32.3 ; U32.3 18.71,55.88 ; U32.3 17.78,56.81 ; U32.3 17.78,54.95 ; M2.1 96,6.68 ; M2.1 93.32,4 ; M2.1 96,1.32 ; M2.1 98.68,4 ; C3.2 84.65,92.77 ; C3.2 82.48,92.77 ; C3.2 83.57,93.55 ; 17.78,57.49 U31.3 ; U31.3 16.85,58.42 ; U31.3 17.78,59.35 ; U31.3 18.71,58.42 ; R21.1 6.85,71.8 ; R21.1 6.85,70.95 ; R21.1 7.27,71.37 ; 14.56,72.93 C30.1 14.56,73.88 ; R39.1 83.05,71.8 ; R39.1 83.05,70.95 ; R39.1 83.47,71.37 ; U7.6 12.7,8.03 ; U7.6 11.02,6.35 ; U7.6 12.7,4.67 ; U7.6 14.38,6.35 ; 63.68,43.72 C14.1 64.12,44.2 ; U1.10 43.18,94.98 ; U1.10 44.18,93.98 ; U1.10 43.18,92.98 ; U46.3 55.88,44.11 ; U46.3 54.95,43.18 ; U46.3 56.81,43.18 ; U46.3 55.88,42.25 ; U1.25 64.5,91.44 ; U1.25 62.5,91.44 ; U1.25 63.5,92.44 ; U1.25 63.5,90.44 ; U42.3 97.45,66.04 ; U42.3 96.52,66.97 ; U42.3 96.52,65.11 ; U42.3 95.59,66.04 ; U1.13 49.26,91.44 ; U1.13 48.26,90.44 ; U1.13 48.26,92.44 ; M3.1 4,82.68 ; M3.1 4,77.32 ; M3.1 1.32,80 ; M3.1 6.68,80 ; 71.12,42.25 U43.3 ; U43.3 72.05,43.18 ; U43.3 70.19,43.18 ; U43.3 71.12,44.11 ; U35.3 86.36,59.35 ; U35.3 86.36,57.49 ; U35.3 87.29,58.42 ; U35.3 85.43,58.42 ; U29.3 17.78,66.97 ; U29.3 16.85,66.04 ; U29.3 18.71,66.04 ; U29.3 17.78,65.11 ; 22.86,4.67 U7.5 ; U7.5 22.86,8.03 ; U7.5 21.18,6.35 ; U7.5 24.54,6.35 ; 86.36,54.95 U36.3 ; U36.3 85.43,55.88 ; U36.3 86.36,56.81 ; U36.3 87.29,55.88 ; U8.5 85.5,6.35 ; U8.5 83.82,8.03 ; U8.5 83.82,4.67 ; U8.5 82.14,6.35 ; 86.85,91.01 C5.1 ; C5.1 88.39,90.22 ; C5.1 89.93,91.01 ; 68.77,8.89 U2.4 ; U2.4 70.93,8.89 ; U2.4 69.85,7.81 ; U2.4 69.85,9.97 ; 85.68,62.51 C38.1 85.68,63.47 ; v1(33.02,66.04) 35.77,66.04 ; v1(33.02,66.04) 33.02,63.29 ; v1(33.02,66.04) 33.02,68.79 ; v1(33.02,66.04) 30.27,66.04 ; 83.05,60.79 R37.1 ; R37.1 83.05,61.64 ; R37.1 83.47,61.21 ; 17.1,73.88 C31.1 17.1,72.93 ; 75.38,15.24 U8.3 ; U8.3 76.94,15.24 ; U8.3 76.16,14.46 ; U8.3 76.16,16.02 ; 36.32,72 C25.1 35.84,71.55 ; 71.4,71.55 C35.1 71.88,72 ; 95.84,62.51 C45.1 95.84,63.47 ; U21.3 7.62,69.51 ; U21.3 7.62,67.65 ; U21.3 8.55,68.58 ; U21.3 6.69,68.58 ; J1.2 99.35,92.36 ; J1.2 94.2,92.36 ; J1.2 96.77,93.44 ; J1.2 96.77,91.28 ; R28.1 14.47,71.8 ; R28.1 14.89,71.37 ; R28.1 14.47,70.95 ; 30.2,71.55 C26.1 29.72,72 ; 51.66,6.35 U10.6 ; U10.6 53.34,4.67 ; U10.6 53.34,8.03 ; U10.6 55.02,6.35 ; 6.94,63.47 C29.1 6.94,62.51 ; 64.12,42.93 C15.1 63.68,43.4 ; 93.05,43.18 U37.3 ; U37.3 94.91,43.18 ; U37.3 93.98,44.11 ; U37.3 93.98,42.25 ; 95.84,72.67 C43.1 95.84,73.63 ; 4.4,62.51 C28.1 4.4,63.47 ; 17.1,62.51 C33.1 17.1,63.47 ; 80.51,15.24 U8.1 ; U8.1 81.29,16.02 ; U8.1 81.29,14.46 ; U8.1 82.07,15.24 ; 4.15,43.18 U33.3 ; U33.3 5.08,44.11 ; U33.3 5.08,42.25 ; U33.3 6.01,43.18 ; 96.52,57.49 U44.3 ; U44.3 97.45,58.42 ; U44.3 96.52,59.35 ; U44.3 95.59,58.42 ; U1.22 58.42,94.98 ; U1.22 59.42,93.98 ; U1.22 58.42,92.98 ; 85.68,72.67 C40.1 85.68,73.63 ; 36.18,42.93 C11.1 35.74,43.4 ; 93.3,63.47 C44.1 93.3,62.51 ; U28.3 18.71,68.58 ; U28.3 17.78,69.51 ; U28.3 17.78,67.65 ; U28.3 16.85,68.58 ; 6.94,72.93 C23.1 6.94,73.88 ; U6.3 35.52,16.02 ; U6.3 34.74,15.24 ; U6.3 36.3,15.24 ; U6.3 35.52,14.46 ; U25.3 8.55,58.42 ; U25.3 7.62,57.49 ; U25.3 6.69,58.42 ; U25.3 7.62,59.35 ; U22.3 8.55,66.04 ; U22.3 6.69,66.04 ; U22.3 7.62,66.97 ; U22.3 7.62,65.11 ; 29.21,5.27 U4.2 ; U4.2 28.13,6.35 ; U4.2 29.21,7.43 ; U4.2 30.29,6.35 ; U5.2 49.53,7.43 ; U5.2 48.45,6.35 ; U5.2 49.53,5.27 ; U5.2 50.61,6.35 ; U26.3 8.55,55.88 ; U26.3 7.62,56.81 ; U26.3 7.62,54.95 ; U26.3 6.69,55.88 ; J1.3 92.12,91.19 ; J1.3 91.05,88.86 ; J1.3 92.12,86.53 ; J1.3 93.2,88.86 ; 96,77.32 M4.1 ; M4.1 98.68,80 ; M4.1 93.32,80 ; M4.1 96,82.68 ; U3.2 90.17,7.43 ; U3.2 89.09,6.35 ; U3.2 90.17,5.27 ; U3.2 91.25,6.35 ; 35.56,92.98 U1.4 ; U1.4 36.56,93.98 ; U1.4 35.56,94.98 ; U8.6 73.66,8.03 ; U8.6 75.34,6.35 ; U8.6 71.98,6.35 ; U8.6 73.66,4.67 ; 48.34,62.96 C1.1 48.34,62.01 ; 93.21,60.79 R42.1 ; R42.1 93.63,61.21 ; R42.1 93.21,61.64 ; U39.3 87.29,66.04 ; U39.3 86.36,65.11 ; U39.3 86.36,66.97 ; U39.3 85.43,66.04 ; U40.3 79.67,43.18 ; U40.3 78.74,42.25 ; U40.3 77.81,43.18 ; U40.3 78.74,44.11 ; U6.6 33.02,8.03 ; U6.6 31.34,6.35 ; U6.6 34.7,6.35 ; U6.6 33.02,4.67 ; 81.31,93.31 PS1.1 82.06,93.79 ; 29.21,7.81 U4.4 ; U4.4 29.21,9.97 ; U4.4 30.29,8.89 ; 68.58,63.29 v1(68.58,66.04) ; v1(68.58,66.04) 65.83,66.04 ; v1(68.58,66.04) 68.58,68.79 ; v1(68.58,66.04) 71.33,66.04 ; 43.18,42.25 U23.3 ; U23.3 44.11,43.18 ; U23.3 43.18,44.11 ; U23.3 42.25,43.18 ; U5.4 49.53,9.97 ; U5.4 49.53,7.81 ; U5.4 50.61,8.89 ; M1.1 6.68,4 ; M1.1 4,1.32 ; M1.1 1.32,4 ; M1.1 4,6.68 ; R40.1 93.21,71.8 ; R40.1 93.21,70.95 ; R40.1 93.63,71.37 ; 17.01,70.95 R29.1 ; R29.1 17.01,71.8 ; R29.1 17.43,71.37 ; R36.1 85.59,61.64 ; R36.1 86.01,61.21 ; R36.1 85.59,60.79 ; U10.1 61.75,15.24 ; U10.1 60.97,16.02 ; U10.1 60.19,15.24 ; U10.1 60.97,14.46 ; U3.4 90.17,9.97 ; U3.4 90.17,7.81 ; U3.4 89.09,8.89 ; U3.4 91.25,8.89 ; U6.5 44.86,6.35 ; U6.5 41.5,6.35 ; U6.5 43.18,8.03 ; U6.5 43.18,4.67 ; 93.3,72.67 C42.1 93.3,73.63 ; R43.1 96.17,61.21 ; R43.1 95.75,61.64 ; R43.1 95.75,60.79 ; 69.85,5.27 U2.2 ; U2.2 68.77,6.35 ; U2.2 70.93,6.35 ; U2.2 69.85,7.43 ; 61.82,6.35 U10.5 ; U10.5 63.5,8.03 ; U10.5 65.18,6.35 ; U10.5 63.5,4.67 ; 20.32,42.25 U30.3 ; U30.3 19.39,43.18 ; U30.3 21.25,43.18 ; U30.3 20.32,44.11 ; 68.76,42.45 C16.1 69.2,42.93 ; 14.56,63.47 C32.1 14.56,62.51 ; 14.42,15.24 U7.3 ; U7.3 15.98,15.24 ; U7.3 15.2,14.46 ; U7.3 15.2,16.02 ; 85.09,90.22 C4.1 ; C4.1 83.55,91.01 ; C4.1 86.63,91.01 ; 86.98,44.2 C18.1 86.54,43.72 ; 86.54,43.4 C19.1 86.98,42.93 ; R41.1 95.75,71.8 ; R41.1 95.75,70.95 ; R41.1 96.17,71.37
  TOP w0.238: v1(46.53,61.01) v1(47.55,61.01) R9.1 ; v1(46.23,62.48) v1(47.24,62.48) C1.1 ; C22.1 v1(3.56,73.41) ; C42.1 v1(92.46,73.15) ; R20.1 v1(3.56,71.37) ; C45.1 v1(95,62.99) ; C44.1 v1(92.46,62.99) ; C38.1 v1(84.84,62.99) ; C31.1 v1(16.26,73.41) ; R38.1 v1(84.84,71.37) ; R41.1 v1(95,71.37) ; C29.1 v1(6.1,62.99) ; C43.1 v1(95,73.15) ; C32.1 v1(13.72,62.99) ; C40.1 v1(84.84,73.15) ; R31.1 v1(16.26,61.21) ; C30.1 v1(13.72,73.41) ; R26.1 v1(3.56,61.21) ; R36.1 v1(84.84,61.21) ; R37.1 v1(82.3,61.21) ; R29.1 v1(16.26,71.37) ; R28.1 v1(13.72,71.37) ; C41.1 v1(82.3,73.15) ; R27.1 v1(6.1,61.21) ; R39.1 v1(82.3,71.37) ; C28.1 v1(3.56,62.99) ; C23.1 v1(6.1,73.41) ; R21.1 v1(6.1,71.37) ; R42.1 v1(92.46,61.21) ; R40.1 v1(92.46,71.37) ; C39.1 v1(82.3,62.99) ; R30.1 v1(13.72,61.21) ; R43.1 v1(95,61.21) ; C33.1 v1(16.26,62.99)
  TOP w0.3: v1(33.78,44.7) v1(33.78,43.94) 33.53,43.69 U14.2 ; C13.1 C12.1 40.82,45.13 v1(40.89,45.21) v1(41.4,45.72) ; U18.2 84.33,43.69 v1(84.58,43.94) v1(84.58,44.7) ; v1(16,44.7) v1(16,43.94) 15.75,43.69 U15.2 ; v1(63.5,63.5) v1(64.26,63.5) 64.4,63.5 64.69,63.79 U34.23 ; C11.1 35.74,42.24 v1(35.81,42.16) v1(35.81,41.4) ; C18.1 86.54,44.88 v1(86.61,44.96) v1(86.61,45.72) ; U17.2 89.41,43.69 v1(89.66,43.94) v1(89.66,44.7) ; v1(34.77,60.99) v1(34.77,61.75) 34.77,62.6 ; 66.83,62.6 v1(66.83,61.75) v1(66.83,60.99) ; v1(33.02,70.36) v1(33.02,71.12) ; v1(33.02,70.36) 32.91,70.25 32.77,70.11 U24.7 ; v1(33.02,70.36) 33.27,70.11 U24.6 ; 33.27,62.6 v1(33.27,61.73) v1(33.27,60.96) ; U20.2 61.47,43.69 v1(61.72,43.94) v1(61.72,44.7) ; C9.1 C8.1 17.96,45.13 v1(18.03,45.21) v1(18.54,45.72) ; 29.59,63.79 28.99,63.79 v1(28.7,63.5) v1(27.94,63.5) ; U19.2 66.55,43.69 v1(66.8,43.94) v1(66.8,44.7) ; v1(38.86,44.7) v1(38.86,43.94) 38.61,43.69 U13.2 ; 70.33,62.6 v1(70.33,61.75) v1(70.33,60.99) ; U34.7 68.33,70.1 v1(68.58,70.35) ; v1(73.91,63.5) v1(73.15,63.5) 72.86,63.79 72.28,63.79 72.28,63.79 U34.38 ; C19.1 86.54,42.24 v1(86.61,42.16) v1(86.61,41.4) ; U16.2 10.67,43.69 v1(10.92,43.94) v1(10.92,44.7) ; v1(69.34,45.72) v1(68.83,45.21) 68.76,45.13 C17.1 C16.1 ; v1(35.81,45.72) v1(35.81,44.96) 35.74,44.88 C10.1 ; v1(63.75,45.72) v1(63.75,44.96) 63.68,44.88 C14.1 ; v1(68.58,70.35) v1(68.58,71.12) ; v1(68.58,70.35) 68.83,70.11 U34.6 ; v1(12.95,45.72) v1(12.95,44.96) 12.88,44.88 C6.1 ; v1(63.75,41.4) v1(63.75,42.16) 63.68,42.24 C15.1 ; v1(92.2,45.72) v1(91.69,45.21) 91.62,45.13 C20.1 C21.1 ; v1(38.1,63.5) v1(37.34,63.5) 37.05,63.79 U24.38 ; v1(12.95,41.4) v1(12.95,42.16) 12.88,42.24 C7.1 ; 68.83,62.6 v1(68.83,61.73) v1(68.83,60.96) ; v1(31.27,60.99) v1(31.27,61.75) 31.27,62.6
  TOP w0.4: v1(26.67,66.04) v1(27.43,66.04) 27.51,66.12 C27.1 28.37,66.29 29.59,66.29 ; v1(85.09,92.96) v1(85.09,92.2) C4.1 ; C5.1 v1(88.39,92.2) v1(88.39,92.96) ; v1(27.94,71.63) v1(28.7,71.63) 28.89,71.63 28.97,71.55 C26.1 ; C3.2 83.57,91.95 v1(83.31,91.69) v1(82.8,91.19) ; C25.1 37.01,71.55 v1(37.08,71.63) v1(37.85,71.63) 37.91,71.63 ; v1(75.16,66.12) v1(74.34,66.12) C34.1 72.81,66.12 72.64,66.29 U34.43 ; v1(73.23,71.55) v1(72.59,71.55) C35.1 ; v1(63.93,71.55) v1(64.57,71.55) C36.1 ; v1(62.08,66.12) v1(62.89,66.12) C37.1 63.93,66.29 U34.18 ; U24.43 37.67,66.29 C24.1 38.53,66.12 v1(38.61,66.04) v1(39.37,66.04) ; v1(76.96,92.71) R11.1 v1(76.2,93.47)
  L1 w0.127: 49.53,5.27 U5.2 ; U5.2 48.45,6.35 ; U5.2 49.53,7.43 ; U5.2 50.61,6.35 ; 85.43,66.04 U39.3 ; U39.3 86.36,65.11 ; U39.3 87.29,66.04 ; U39.3 86.36,66.97 ; U23.3 44.11,43.18 ; U23.3 43.18,42.25 ; U23.3 43.18,44.11 ; U23.3 42.25,43.18 ; U37.3 93.98,44.11 ; U37.3 93.05,43.18 ; U37.3 94.91,43.18 ; U37.3 93.98,42.25 ; 91.05,88.86 J1.3 ; J1.3 92.12,86.53 ; J1.3 92.12,91.19 ; J1.3 93.2,88.86 ; 50.8,92.98 U1.16 ; U1.16 49.8,93.98 ; U1.16 50.8,94.98 ; U1.16 51.8,93.98 ; 7.62,54.95 U26.3 ; U26.3 6.69,55.88 ; U26.3 8.55,55.88 ; U26.3 7.62,56.81 ; 77.81,43.18 U40.3 ; U40.3 78.74,44.11 ; U40.3 78.74,42.25 ; U40.3 79.67,43.18 ; U1.10 44.18,93.98 ; U1.10 42.18,93.98 ; U1.10 43.18,92.98 ; U1.10 43.18,94.98 ; U1.19 55.88,92.44 ; U1.19 55.88,90.44 ; U1.19 56.88,91.44 ; U1.19 54.88,91.44 ; U42.3 96.52,66.97 ; U42.3 97.45,66.04 ; U42.3 96.52,65.11 ; U42.3 95.59,66.04 ; U3.4 91.25,8.89 ; U3.4 89.09,8.89 ; U3.4 90.17,9.97 ; U3.4 90.17,7.81 ; U8.1 81.29,16.02 ; U8.1 80.51,15.24 ; U8.1 81.29,14.46 ; U8.1 82.07,15.24 ; 32.02,91.44 U1.1 ; U1.1 34.02,91.44 ; U1.1 33.02,92.44 ; U1.1 33.02,90.44 ; 27.94,42.25 U27.3 ; U27.3 28.87,43.18 ; U27.3 27.94,44.11 ; U27.3 27.01,43.18 ; 60.19,15.24 U10.1 ; U10.1 60.97,16.02 ; U10.1 61.75,15.24 ; U10.1 60.97,14.46 ; 17.78,54.95 U32.3 ; U32.3 18.71,55.88 ; U32.3 16.85,55.88 ; U32.3 17.78,56.81 ; U36.3 86.36,56.81 ; U36.3 85.43,55.88 ; U36.3 87.29,55.88 ; U36.3 86.36,54.95 ; 48.45,8.89 U5.4 ; U5.4 49.53,7.81 ; U5.4 50.61,8.89 ; U5.4 49.53,9.97 ; M4.1 96,82.68 ; M4.1 98.68,80 ; M4.1 96,77.32 ; M4.1 93.32,80 ; 6.69,66.04 U22.3 ; U22.3 7.62,66.97 ; U22.3 7.62,65.11 ; U22.3 8.55,66.04 ; U28.3 18.71,68.58 ; U28.3 17.78,67.65 ; U28.3 16.85,68.58 ; U28.3 17.78,69.51 ; 73.66,4.67 U8.6 ; U8.6 73.66,8.03 ; U8.6 71.98,6.35 ; U8.6 75.34,6.35 ; U7.5 24.54,6.35 ; U7.5 21.18,6.35 ; U7.5 22.86,4.67 ; U7.5 22.86,8.03 ; 4,77.32 M3.1 ; M3.1 6.68,80 ; M3.1 1.32,80 ; M3.1 4,82.68 ; 95.59,58.42 U44.3 ; U44.3 96.52,59.35 ; U44.3 97.45,58.42 ; U44.3 96.52,57.49 ; 85.43,68.58 U38.3 ; U38.3 86.36,67.65 ; U38.3 86.36,69.51 ; U38.3 87.29,68.58 ; 17.78,65.11 U29.3 ; U29.3 16.85,66.04 ; U29.3 17.78,66.97 ; U29.3 18.71,66.04 ; U2.4 70.93,8.89 ; U2.4 68.77,8.89 ; U2.4 69.85,9.97 ; U2.4 69.85,7.81 ; U25.3 7.62,59.35 ; U25.3 7.62,57.49 ; U25.3 8.55,58.42 ; U25.3 6.69,58.42 ; 7.62,67.65 U21.3 ; U21.3 7.62,69.51 ; U21.3 6.69,68.58 ; U21.3 8.55,68.58 ; 12.7,4.67 U7.6 ; U7.6 12.7,8.03 ; U7.6 14.38,6.35 ; U7.6 11.02,6.35 ; 19.39,43.18 U30.3 ; U30.3 20.32,42.25 ; U30.3 21.25,43.18 ; U30.3 20.32,44.11 ; U10.6 55.02,6.35 ; U10.6 51.66,6.35 ; U10.6 53.34,8.03 ; U10.6 53.34,4.67 ; U8.3 76.94,15.24 ; U8.3 76.16,14.46 ; U8.3 76.16,16.02 ; U8.3 75.38,15.24 ; U33.3 5.08,44.11 ; U33.3 4.15,43.18 ; U33.3 6.01,43.18 ; U33.3 5.08,42.25 ; 94.2,92.36 J1.2 ; J1.2 96.77,91.28 ; J1.2 99.35,92.36 ; J1.2 96.77,93.44 ; 86.36,57.49 U35.3 ; U35.3 86.36,59.35 ; U35.3 87.29,58.42 ; U35.3 85.43,58.42 ; U6.3 36.3,15.24 ; U6.3 35.52,14.46 ; U6.3 34.74,15.24 ; U6.3 35.52,16.02 ; 28.13,6.35 U4.2 ; U4.2 29.21,7.43 ; U4.2 29.21,5.27 ; U4.2 30.29,6.35 ; U31.3 18.71,58.42 ; U31.3 16.85,58.42 ; U31.3 17.78,59.35 ; U31.3 17.78,57.49 ; U1.25 64.5,91.44 ; U1.25 63.5,92.44 ; U1.25 62.5,91.44 ; U1.25 63.5,90.44 ; U46.3 56.81,43.18 ; U46.3 54.95,43.18 ; U46.3 55.88,42.25 ; U46.3 55.88,44.11 ; 68.77,6.35 U2.2 ; U2.2 69.85,5.27 ; U2.2 69.85,7.43 ; U2.2 70.93,6.35 ; U4.4 30.29,8.89 ; U4.4 28.13,8.89 ; U4.4 29.21,9.97 ; U4.4 29.21,7.81 ; U10.5 63.5,8.03 ; U10.5 65.18,6.35 ; U10.5 63.5,4.67 ; U10.5 61.82,6.35 ; 15.2,14.46 U7.3 ; U7.3 15.2,16.02 ; U7.3 15.98,15.24 ; U7.3 14.42,15.24 ; U7.1 21.11,15.24 ; U7.1 20.33,16.02 ; U7.1 19.55,15.24 ; U7.1 20.33,14.46 ; U1.13 49.26,91.44 ; U1.13 47.26,91.44 ; U1.13 48.26,92.44 ; U1.13 48.26,90.44 ; 89.09,6.35 U3.2 ; U3.2 90.17,7.43 ; U3.2 91.25,6.35 ; U3.2 90.17,5.27 ; 58.42,92.98 U1.22 ; U1.22 58.42,94.98 ; U1.22 59.42,93.98 ; U1.22 57.42,93.98 ; U1.4 35.56,94.98 ; U1.4 34.56,93.98 ; U1.4 36.56,93.98 ; U1.4 35.56,92.98 ; M1.1 6.68,4 ; M1.1 4,6.68 ; M1.1 4,1.32 ; M1.1 1.32,4 ; M2.1 98.68,4 ; M2.1 96,6.68 ; M2.1 93.32,4 ; M2.1 96,1.32 ; 40.64,90.44 U1.7 ; U1.7 39.64,91.44 ; U1.7 40.64,92.44 ; U1.7 41.64,91.44 ; 96.52,67.65 U41.3 ; U41.3 95.59,68.58 ; U41.3 97.45,68.58 ; U41.3 96.52,69.51 ; U6.1 40.65,16.02 ; U6.1 40.65,14.46 ; U6.1 41.43,15.24 ; U6.1 39.87,15.24 ; 95.59,55.88 U45.3 ; U45.3 96.52,54.95 ; U45.3 97.45,55.88 ; U45.3 96.52,56.81 ; 70.19,43.18 U43.3 ; U43.3 71.12,44.11 ; U43.3 71.12,42.25 ; U43.3 72.05,43.18 ; U6.5 44.86,6.35 ; U6.5 43.18,8.03 ; U6.5 41.5,6.35 ; U6.5 43.18,4.67 ; 50.89,64.77 U11.3 ; U11.3 52.74,64.77 ; U11.3 51.82,65.7 ; U11.3 51.82,63.84 ; 55.06,15.24 U10.3 ; U10.3 55.84,14.46 ; U10.3 55.84,16.02 ; U10.3 56.62,15.24 ; U6.6 34.7,6.35 ; U6.6 33.02,8.03 ; U6.6 31.34,6.35 ; U6.6 33.02,4.67 ; 82.14,6.35 U8.5 ; U8.5 83.82,8.03 ; U8.5 83.82,4.67 ; U8.5 85.5,6.35
  L2 w0.127: U8.6 75.34,6.35 ; U8.6 71.98,6.35 ; U8.6 73.66,4.67 ; U8.6 73.66,8.03 ; 53.34,4.67 U10.6 ; U10.6 55.02,6.35 ; U10.6 51.66,6.35 ; U10.6 53.34,8.03 ; U3.2 90.17,7.43 ; U3.2 91.25,6.35 ; U3.2 90.17,5.27 ; U3.2 89.09,6.35 ; 81.29,14.46 U8.1 ; U8.1 82.07,15.24 ; U8.1 81.29,16.02 ; U8.1 80.51,15.24 ; 14.42,15.24 U7.3 ; U7.3 15.98,15.24 ; U7.3 15.2,16.02 ; U7.3 15.2,14.46 ; 49.53,5.27 U5.2 ; U5.2 50.61,6.35 ; U5.2 49.53,7.43 ; U5.2 48.45,6.35 ; 55.84,14.46 U10.3 ; U10.3 55.06,15.24 ; U10.3 56.62,15.24 ; U10.3 55.84,16.02 ; U7.6 12.7,8.03 ; U7.6 11.02,6.35 ; U7.6 12.7,4.67 ; U7.6 14.38,6.35 ; 20.33,14.46 U7.1 ; U7.1 20.33,16.02 ; U7.1 21.11,15.24 ; U7.1 19.55,15.24 ; 43.18,4.67 U6.5 ; U6.5 43.18,8.03 ; U6.5 41.5,6.35 ; U6.5 44.86,6.35 ; 4,1.32 M1.1 ; M1.1 4,6.68 ; M1.1 6.68,4 ; M1.1 1.32,4 ; U5.4 50.61,8.89 ; U5.4 48.45,8.89 ; U5.4 49.53,7.81 ; U5.4 49.53,9.97 ; 28.13,6.35 U4.2 ; U4.2 29.21,5.27 ; U4.2 29.21,7.43 ; U4.2 30.29,6.35 ; 34.74,15.24 U6.3 ; U6.3 35.52,16.02 ; U6.3 36.3,15.24 ; U6.3 35.52,14.46 ; U8.5 85.5,6.35 ; U8.5 83.82,8.03 ; U8.5 83.82,4.67 ; U8.5 82.14,6.35 ; U10.5 65.18,6.35 ; U10.5 63.5,4.67 ; U10.5 61.82,6.35 ; U10.5 63.5,8.03 ; 69.85,5.27 U2.2 ; U2.2 70.93,6.35 ; U2.2 69.85,7.43 ; U2.2 68.77,6.35 ; U4.4 29.21,9.97 ; U4.4 30.29,8.89 ; U4.4 29.21,7.81 ; U4.4 28.13,8.89 ; 33.02,4.67 U6.6 ; U6.6 33.02,8.03 ; U6.6 31.34,6.35 ; U6.6 34.7,6.35 ; M2.1 98.68,4 ; M2.1 96,6.68 ; M2.1 93.32,4 ; M2.1 96,1.32 ; 60.97,14.46 U10.1 ; U10.1 60.19,15.24 ; U10.1 61.75,15.24 ; U10.1 60.97,16.02 ; U6.1 40.65,16.02 ; U6.1 39.87,15.24 ; U6.1 40.65,14.46 ; U6.1 41.43,15.24 ; 89.09,8.89 U3.4 ; U3.4 90.17,9.97 ; U3.4 90.17,7.81 ; U3.4 91.25,8.89 ; 69.85,7.81 U2.4 ; U2.4 70.93,8.89 ; U2.4 68.77,8.89 ; U2.4 69.85,9.97 ; U8.3 76.16,16.02 ; U8.3 76.94,15.24 ; U8.3 75.38,15.24 ; U8.3 76.16,14.46 ; 21.18,6.35 U7.5 ; U7.5 24.54,6.35 ; U7.5 22.86,8.03 ; U7.5 22.86,4.67
  BOTTOM w0.127: U7.1 21.11,15.24 ; U7.1 20.33,14.46 ; U7.1 19.55,15.24 ; U7.1 20.33,16.02 ; U4.2 30.29,6.35 ; U4.2 28.13,6.35 ; U4.2 29.21,5.27 ; U4.2 29.21,7.43 ; 50.8,92.98 U1.16 ; U1.16 50.8,94.98 ; U1.16 51.8,93.98 ; U1.16 49.8,93.98 ; U1.4 35.56,94.98 ; U1.4 36.56,93.98 ; U1.4 34.56,93.98 ; U1.4 35.56,92.98 ; U2.2 69.85,7.43 ; U2.2 69.85,5.27 ; U2.2 70.93,6.35 ; U2.2 68.77,6.35 ; 54.88,91.44 U1.19 ; U1.19 55.88,90.44 ; U1.19 55.88,92.44 ; U1.19 56.88,91.44 ; 48.26,90.44 U1.13 ; U1.13 49.26,91.44 ; U1.13 48.26,92.44 ; U1.13 47.26,91.44 ; 40.64,90.44 U1.7 ; U1.7 40.64,92.44 ; U1.7 41.64,91.44 ; U1.7 39.64,91.44 ; U46.3 56.81,43.18 ; U46.3 54.95,43.18 ; U46.3 55.88,42.25 ; U46.3 55.88,44.11 ; 95.59,66.04 U42.3 ; U42.3 96.52,66.97 ; U42.3 96.52,65.11 ; U42.3 97.45,66.04 ; 63.5,4.67 U10.5 ; U10.5 61.82,6.35 ; U10.5 63.5,8.03 ; U10.5 65.18,6.35 ; 57.42,93.98 U1.22 ; U1.22 58.42,92.98 ; U1.22 59.42,93.98 ; U1.22 58.42,94.98 ; U7.3 15.2,16.02 ; U7.3 14.42,15.24 ; U7.3 15.98,15.24 ; U7.3 15.2,14.46 ; 63.5,90.44 U1.25 ; U1.25 64.5,91.44 ; U1.25 62.5,91.44 ; U1.25 63.5,92.44 ; 70.19,43.18 U43.3 ; U43.3 71.12,42.25 ; U43.3 71.12,44.11 ; U43.3 72.05,43.18 ; 75.38,15.24 U8.3 ; U8.3 76.94,15.24 ; U8.3 76.16,16.02 ; U8.3 76.16,14.46 ; 6.69,66.04 U22.3 ; U22.3 7.62,66.97 ; U22.3 8.55,66.04 ; U22.3 7.62,65.11 ; 50.89,64.77 U11.3 ; U11.3 52.74,64.77 ; U11.3 51.82,65.7 ; U11.3 51.82,63.84 ; U26.3 7.62,56.81 ; U26.3 8.55,55.88 ; U26.3 7.62,54.95 ; U26.3 6.69,55.88 ; U40.3 79.67,43.18 ; U40.3 78.74,42.25 ; U40.3 77.81,43.18 ; U40.3 78.74,44.11 ; 86.36,54.95 U36.3 ; U36.3 85.43,55.88 ; U36.3 86.36,56.81 ; U36.3 87.29,55.88 ; 96,77.32 M4.1 ; M4.1 96,82.68 ; M4.1 93.32,80 ; M4.1 98.68,80 ; 49.53,5.27 U5.2 ; U5.2 48.45,6.35 ; U5.2 50.61,6.35 ; U5.2 49.53,7.43 ; U7.6 14.38,6.35 ; U7.6 12.7,4.67 ; U7.6 12.7,8.03 ; U7.6 11.02,6.35 ; U28.3 17.78,69.51 ; U28.3 17.78,67.65 ; U28.3 18.71,68.58 ; U28.3 16.85,68.58 ; U3.2 90.17,7.43 ; U3.2 89.09,6.35 ; U3.2 90.17,5.27 ; U3.2 91.25,6.35 ; U41.3 96.52,69.51 ; U41.3 97.45,68.58 ; U41.3 96.52,67.65 ; U31.3 17.78,59.35 ; U31.3 17.78,57.49 ; U31.3 16.85,58.42 ; U31.3 18.71,58.42 ; 73.66,4.67 U8.6 ; U8.6 73.66,8.03 ; U8.6 71.98,6.35 ; U8.6 75.34,6.35 ; U6.1 40.65,16.02 ; U6.1 41.43,15.24 ; U6.1 40.65,14.46 ; U6.1 39.87,15.24 ; 83.82,4.67 U8.5 ; U8.5 83.82,8.03 ; U8.5 85.5,6.35 ; U8.5 82.14,6.35 ; 29.21,7.81 U4.4 ; U4.4 30.29,8.89 ; U4.4 28.13,8.89 ; U4.4 29.21,9.97 ; U45.3 96.52,56.81 ; U45.3 96.52,54.95 ; U45.3 97.45,55.88 ; U45.3 95.59,55.88 ; 96.52,57.49 U44.3 ; U44.3 97.45,58.42 ; U44.3 95.59,58.42 ; U44.3 96.52,59.35 ; U21.3 8.55,68.58 ; U21.3 7.62,69.51 ; U21.3 7.62,67.65 ; U21.3 6.69,68.58 ; 4,77.32 M3.1 ; M3.1 1.32,80 ; M3.1 4,82.68 ; M3.1 6.68,80 ; U33.3 5.08,44.11 ; U33.3 4.15,43.18 ; U33.3 5.08,42.25 ; U33.3 6.01,43.18 ; 94.2,92.36 J1.2 ; J1.2 96.77,93.44 ; J1.2 99.35,92.36 ; J1.2 96.77,91.28 ; 53.34,4.67 U10.6 ; U10.6 53.34,8.03 ; U10.6 51.66,6.35 ; U10.6 55.02,6.35 ; J1.3 92.12,91.19 ; J1.3 92.12,86.53 ; J1.3 93.2,88.86 ; J1.3 91.05,88.86 ; 21.18,6.35 U7.5 ; U7.5 22.86,8.03 ; U7.5 24.54,6.35 ; U7.5 22.86,4.67 ; U37.3 94.91,43.18 ; U37.3 93.98,44.11 ; U37.3 93.98,42.25 ; U1.1 33.02,92.44 ; U1.1 33.02,90.44 ; U1.1 34.02,91.44 ; U1.1 32.02,91.44 ; 89.09,8.89 U3.4 ; U3.4 90.17,9.97 ; U3.4 90.17,7.81 ; U3.4 91.25,8.89 ; 68.77,8.89 U2.4 ; U2.4 69.85,9.97 ; U2.4 69.85,7.81 ; U2.4 70.93,8.89 ; 20.32,42.25 U30.3 ; U30.3 19.39,43.18 ; U30.3 20.32,44.11 ; U30.3 21.25,43.18 ; 43.18,42.25 U23.3 ; U23.3 42.25,43.18 ; U23.3 44.11,43.18 ; U23.3 43.18,44.11 ; U6.5 43.18,8.03 ; U6.5 44.86,6.35 ; U6.5 43.18,4.67 ; U6.5 41.5,6.35 ; 86.36,57.49 U35.3 ; U35.3 85.43,58.42 ; U35.3 86.36,59.35 ; U35.3 87.29,58.42 ; U38.3 87.29,68.58 ; U38.3 85.43,68.58 ; U38.3 86.36,69.51 ; U38.3 86.36,67.65 ; 48.45,8.89 U5.4 ; U5.4 49.53,7.81 ; U5.4 49.53,9.97 ; U5.4 50.61,8.89 ; U25.3 8.55,58.42 ; U25.3 7.62,57.49 ; U25.3 6.69,58.42 ; U25.3 7.62,59.35 ; 35.52,14.46 U6.3 ; U6.3 36.3,15.24 ; U6.3 35.52,16.02 ; U6.3 34.74,15.24 ; 55.06,15.24 U10.3 ; U10.3 56.62,15.24 ; U10.3 55.84,16.02 ; U10.3 55.84,14.46 ; M1.1 4,6.68 ; M1.1 6.68,4 ; M1.1 1.32,4 ; M1.1 4,1.32 ; U1.10 43.18,94.98 ; U1.10 42.18,93.98 ; U1.10 43.18,92.98 ; U1.10 44.18,93.98 ; U29.3 17.78,66.97 ; U29.3 17.78,65.11 ; U29.3 18.71,66.04 ; U29.3 16.85,66.04 ; U39.3 87.29,66.04 ; U39.3 86.36,65.11 ; U39.3 86.36,66.97 ; U39.3 85.43,66.04 ; 17.78,54.95 U32.3 ; U32.3 18.71,55.88 ; U32.3 16.85,55.88 ; U32.3 17.78,56.81 ; M2.1 98.68,4 ; M2.1 96,1.32 ; M2.1 96,6.68 ; M2.1 93.32,4 ; U27.3 28.87,43.18 ; U27.3 27.94,42.25 ; U27.3 27.01,43.18 ; U27.3 27.94,44.11 ; 81.29,14.46 U8.1 ; U8.1 82.07,15.24 ; U8.1 81.29,16.02 ; U8.1 80.51,15.24 ; U10.1 61.75,15.24 ; U10.1 60.19,15.24 ; U10.1 60.97,14.46 ; U10.1 60.97,16.02 ; U6.6 33.02,8.03 ; U6.6 31.34,6.35 ; U6.6 33.02,4.67 ; U6.6 34.7,6.35
  vias: v1(1.21,50.74) v1(1.21,46.74) v1(1.21,42.1) v1(1.21,38.1) v1(1.21,33.72) v1(1.21,29.72) v1(1.21,25.08) v1(1.21,21.08) v1(1.78,95.57) v1(1.78,91.57) v1(1.78,87.57) v1(1.78,83.57) v1(2.22,14.67) v1(2.22,10.67) v1(3.81,41.66) v1(3.81,39.62) v1(5.52,50.86) v1(5.52,46.86) v1(5.78,95.57) v1(5.78,91.57) v1(5.78,87.57) v1(5.78,83.57) v1(6.03,28.51) v1(6.03,24.51) v1(6.1,41.66) v1(6.1,39.62) v1(6.22,14.67) v1(6.22,10.67) v1(6.86,38.61) v1(7.11,42.67) v1(7.3,35.88) v1(7.3,31.88) v1(8.13,38.61) v1(8.53,27.76) v1(8.53,25.81) v1(8.78,28.73) v1(8.75,26.79) v1(8.93,24.9) v1(9.14,1.59) v1(9.19,38.64) v1(9.19,37.64) v1(9.19,36.64) v1(9.19,35.64) v1(9.19,34.64) v1(9.19,33.64) v1(9.19,32.64) v1(9.19,31.64) v1(9.19,30.64) v1(9.19,29.64) v1(9.19,23.93) v1(9.19,22.93) v1(9.19,21.93) v1(9.19,20.93) v1(9.19,19.93) v1(9.19,18.93) v1(9.29,47.23) v1(9.29,46.23) v1(9.29,45.23) v1(9.29,44.23) v1(9.49,17.98) v1(9.78,95.57) v1(9.78,91.57) v1(9.78,87.57) v1(9.78,83.57) v1(9.78,80.01) v1(9.84,61.02) v1(9.84,57.02) v1(9.93,48) v1(10.2,17.27) v1(10.64,48.7) v1(10.67,50.8) v1(10.77,27.65) v1(10.81,25.68) v1(10.94,38.64) v1(10.94,37.64) v1(10.94,36.64) v1(10.94,35.64) v1(10.94,34.64) v1(10.94,33.64) v1(10.94,32.64) v1(10.94,31.64) v1(10.94,30.64) v1(10.94,29.64) v1(10.94,28.64) v1(10.94,26.67) v1(10.94,24.68) v1(10.94,23.68) v1(10.94,22.68) v1(10.94,21.68) v1(10.94,20.68) v1(10.94,19.68) v1(10.9,16.57) v1(10.92,8.64) v1(11.04,46.23) v1(11.21,18.72) v1(11.35,49.41) v1(11.51,47.11) v1(11.61,15.86) v1(11.92,18.02) v1(12.05,50.12) v1(12.22,47.81) v1(12.19,11.68) v1(12.19,8.64) v1(12.32,15.15) v1(12.6,32.67) v1(12.63,30.68) v1(12.63,17.31) v1(12.74,33.67) v1(12.7,31.68) v1(12.66,29.68) v1(12.66,28.68) v1(12.76,50.83) v1(12.93,48.52) v1(13.02,14.44) v1(13.14,1.59) v1(13.33,16.6) v1(13.35,27.96) v1(13.47,51.53) v1(13.53,34.29) v1(13.63,49.23) v1(13.73,13.74) v1(13.72,8.64) v1(13.78,95.57) v1(13.78,91.57) v1(13.78,87.57) v1(13.78,83.57) v1(13.78,80.01) v1(13.97,41.91) v1(13.97,40.64) v1(13.97,39.37) v1(14.04,15.89) v1(14.17,52.24) v1(14.34,49.94) v1(14.34,27.84) v1(14.38,47.23) v1(14.38,46.23) v1(14.38,45.23) v1(14.38,44.23) v1(14.38,43.23) v1(14.44,13.03) v1(14.46,38.64) v1(14.46,36.64) v1(14.46,35.64) v1(14.46,34.64) v1(14.46,26.84) v1(14.46,25.84) v1(14.46,24.84) v1(14.46,23.84) v1(14.46,22.84) v1(14.46,21.84) v1(14.46,20.84) v1(14.46,19.84) v1(14.46,18.84) v1(14.46,17.84) v1(14.88,52.95) v1(14.86,48.1) v1(14.86,16.93) v1(15.05,50.64) v1(14.99,8.38) v1(15.04,7.2) v1(15.04,6.2) v1(15.04,5.2) v1(15.14,12.32) v1(15.57,48.81) v1(15.83,53.27) v1(15.76,51.35) v1(16.01,11.83) v1(16.12,46.23) v1(16.06,32.65) v1(16.15,31.65) v1(16.11,30.65) v1(16.12,29.65) v1(16.14,28.65) v1(16.21,38.64) v1(16.21,36.64) v1(16.21,35.64) v1(16.21,34.64) v1(16.17,33.64) v1(16.21,27.65) v1(16.21,26.65) v1(16.21,25.65) v1(16.21,24.65) v1(16.21,23.65) v1(16.21,22.65) v1(16.21,21.65) v1(16.21,20.65) v1(16.21,19.65) v1(16.21,18.65) v1(16.16,13.77) v1(16.28,49.51) v1(16.41,47.18) v1(16.54,17.71) v1(16.74,51.53) v1(16.83,53.27) v1(16.76,14.48) v1(17.02,13.72) v1(17.02,11.68) v1(17.12,47.89) v1(17.14,1.59) v1(17.23,49.82) v1(17.25,17) v1(17.53,38.61) v1(17.53,32.76) v1(17.53,28.76) v1(17.53,24.76) v1(17.53,20.76) v1(17.74,51.53) v1(17.65,9.59) v1(17.65,5.59) v1(17.78,95.57) v1(17.78,91.57) v1(17.78,87.57) v1(17.78,83.57) v1(17.78,80.01) v1(17.83,53.27) v1(18.1,48.07) v1(18.23,49.82) v1(18.54,16.51) v1(18.54,14.48) v1(18.54,13.72) v1(18.54,11.68) v1(18.74,51.53) v1(18.83,53.27) v1(18.8,38.61) v1(19.1,48.07) v1(19.24,97.6) v1(19.23,49.82) v1(19.3,41.66) v1(19.3,39.88) v1(19.74,51.53) v1(19.83,53.27) v1(20.1,48.07) v1(20.23,49.82) v1(20.62,7.2) v1(20.62,6.2) v1(20.62,5.2) v1(20.74,51.53) v1(20.83,53.27) v1(20.83,8.38) v1(21.08,95.57) v1(21.08,91.57) v1(21.08,87.57) v1(21.08,83.57) v1(21.08,80.01) v1(21.08,73.15) v1(21.1,48.07) v1(21.14,1.59) v1(21.23,49.82) v1(21.34,41.66) v1(21.34,39.88) v1(21.53,61.02) v1(21.53,57.02) v1(21.53,28.76) v1(21.53,24.76) v1(21.53,20.76) v1(21.53,16.76) v1(21.74,51.53) v1(21.83,53.27) v1(22.1,48.07) v1(22.1,8.64) v1(22.23,49.82) v1(22.61,69.09) v1(22.74,51.53) v1(22.82,53.37) v1(22.8,45.91) v1(22.8,41.91) v1(22.8,37.53) v1(23.11,97.6) v1(23.1,48.07) v1(23.23,49.82) v1(23.53,54.08) v1(23.49,14.92) v1(23.49,10.92) v1(23.62,8.64) v1(23.71,51.78) v1(24.1,48.07) v1(24.24,54.78) v1(24.22,49.96) v1(24.38,89.92) v1(24.38,85.6) v1(24.38,81.28) v1(24.38,72.64) v1(24.41,52.49) v1(24.64,93.73) v1(24.89,70.36) v1(24.94,55.49) v1(24.92,50.67) v1(24.89,8.64) v1(25.15,78.49) v1(25.08,62.04) v1(25.08,58.04) v1(25.12,53.2) v1(25.07,48.34) v1(25.15,7.37) v1(25.15,6.1) v1(25.15,4.83) v1(25.34,91.38) v1(25.34,87.38) v1(25.34,45.91) v1(25.34,41.91) v1(25.34,37.53) v1(25.53,32.76) v1(25.53,24.76) v1(25.53,20.76) v1(25.53,16.76) v1(25.63,51.38) v1(25.65,56.2) v1(25.65,1.59) v1(25.83,53.9) v1(25.77,49.05) v1(26.34,52.08) v1(26.36,56.9) v1(26.53,54.61) v1(26.48,49.76) v1(26.92,41.66) v1(26.92,39.62) v1(27.05,52.79) v1(27.11,97.6) v1(27.07,57.61) v1(27.24,55.32) v1(27.19,50.46) v1(27.77,58.32) v1(27.75,53.5) v1(27.95,56.03) v1(27.89,51.17) v1(28.19,72.64) v1(28.48,59.03) v1(28.46,54.21) v1(28.6,51.88) v1(28.66,56.73) v1(28.96,41.66) v1(28.96,39.62) v1(29.21,78.49) v1(29.19,59.73) v1(29.17,54.91) v1(29.34,91.38) v1(29.34,87.38) v1(29.31,52.59) v1(29.36,57.44) v1(29.72,93.98) v1(29.71,61.59) v1(29.71,60.59) v1(29.65,1.59) v1(29.87,55.62) v1(29.91,49.97) v1(29.91,45.97) v1(30.02,53.29) v1(29.97,42.67) v1(29.97,38.61) v1(30.07,58.15) v1(30.1,24.76) v1(30.1,20.76) v1(30.1,16.76) v1(30.42,31.54) v1(30.36,30.54) v1(30.58,56.33) v1(30.72,54) v1(30.73,13.21) v1(30.78,58.85) v1(30.92,97.6) v1(30.99,66.04) v1(30.99,42.67) v1(30.99,38.61) v1(31.01,29.78) v1(31.14,32.23) v1(31.18,58.13) v1(31.18,57.13) v1(31.24,4.32) v1(31.43,54.71) v1(31.45,59.59) v1(31.5,8.64) v1(32,66.04) v1(32,42.67) v1(32,29.63) v1(32.14,55.41) v1(32.05,38.64) v1(32.05,37.64) v1(32.05,36.64) v1(32.05,35.64) v1(32.05,34.64) v1(32.05,33.64) v1(32.05,32.64) v1(32.05,28.63) v1(32.05,27.63) v1(32.05,26.63) v1(32.05,25.63) v1(32.05,24.63) v1(32.05,23.63) v1(32.05,22.63) v1(32.05,21.63) v1(32.05,20.63) v1(32.05,19.63) v1(32.05,18.63) v1(32.05,17.63) v1(32.05,16.63) v1(32.05,15.63) v1(32.16,49.61) v1(32.16,48.61) v1(32.16,47.61) v1(32.16,46.61) v1(32.16,45.61) v1(32.16,44.61) v1(32.16,43.61) v1(32.46,14.72) v1(32.51,4.32) v1(32.65,50.48) v1(32.84,56.12) v1(32.77,10.92) v1(32.77,8.64) v1(33.02,77.98) v1(33.02,68.33) v1(33.02,67.06) v1(33.02,65.02) v1(33.02,64.01) v1(33.15,58.94) v1(33.15,57.94) v1(33.15,54.23) v1(33.15,52.34) v1(33.15,51.34) v1(33.17,14.01) v1(33.27,83.06) v1(33.27,74.17) v1(33.53,57.02) v1(33.51,55.16) v1(33.49,53.29) v1(33.65,30.65) v1(33.65,1.59) v1(33.8,38.64) v1(33.8,37.64) v1(33.8,36.64) v1(33.8,35.64) v1(33.8,34.64) v1(33.8,33.64) v1(33.8,32.64) v1(33.77,31.64) v1(33.8,29.66) v1(33.8,28.66) v1(33.8,27.66) v1(33.8,26.66) v1(33.8,25.66) v1(33.8,24.66) v1(33.8,23.66) v1(33.8,22.66) v1(33.8,21.66) v1(33.8,20.66) v1(33.8,19.66) v1(33.8,18.66) v1(33.8,17.66) v1(33.8,16.66) v1(33.9,49.19) v1(33.9,48.19) v1(33.9,47.19) v1(33.9,46.19) v1(33.88,13.3) v1(34.04,85.6) v1(34.04,66.04) v1(34.04,39.88) v1(33.97,15.67) v1(34.04,8.64) v1(34.04,4.32) v1(34.58,49.93) v1(34.63,27.3) v1(34.64,26.3) v1(34.58,12.59) v1(34.68,28.3) v1(34.67,25.3) v1(34.8,97.6) v1(34.9,59.94) v1(34.9,58.94) v1(34.94,51.88) v1(34.9,50.88) v1(35.05,66.04) v1(35.29,11.89) v1(35.31,8.64) v1(35.31,4.32) v1(35.4,28.99) v1(35.38,24.59) v1(35.35,7.46) v1(35.35,6.46) v1(35.35,5.46) v1(35.81,73.91) v1(35.94,51.89) v1(36.07,58.42) v1(36.11,13.57) v1(36.32,87.38) v1(36.29,11.83) v1(36.38,61.94) v1(36.4,29.09) v1(36.38,24.48) v1(36.58,78.99) v1(36.64,61.19) v1(36.82,54.28) v1(36.81,52.37) v1(36.98,43.17) v1(36.98,42.17) v1(36.98,41.17) v1(37.08,57.66) v1(37.08,56.64) v1(37.11,55.24) v1(37.12,53.33) v1(37.08,39.88) v1(37.11,13.57) v1(37.23,47.96) v1(37.23,46.96) v1(37.23,45.96) v1(37.23,44.96) v1(37.23,43.96) v1(37.23,38.64) v1(37.23,37.64) v1(37.23,36.64) v1(37.23,35.64) v1(37.23,34.64) v1(37.23,33.64) v1(37.23,32.64) v1(37.23,31.64) v1(37.23,30.64) v1(37.23,29.64) v1(37.23,23.96) v1(37.23,22.96) v1(37.23,21.96) v1(37.23,20.96) v1(37.23,19.96) v1(37.23,18.96) v1(37.23,17.96) v1(37.23,16.96) v1(37.23,15.96) v1(37.27,50.94) v1(37.26,48.96) v1(37.29,11.83) v1(37.37,51.94) v1(37.41,49.95) v1(37.45,60.38) v1(37.65,1.59) v1(37.85,87.38) v1(37.97,9.33) v1(37.97,5.33) v1(38.16,59.67) v1(38.6,27.71) v1(38.6,25.86) v1(38.8,97.6) v1(38.87,58.96) v1(38.98,56.91) v1(38.98,55.91) v1(38.98,54.91) v1(38.98,47.5) v1(38.98,46.5) v1(38.98,45.5) v1(38.97,37.64) v1(38.97,36.64) v1(38.97,35.64) v1(38.97,34.64) v1(38.97,33.64) v1(38.97,32.64) v1(38.97,31.64) v1(38.97,30.64) v1(38.97,29.64) v1(38.97,28.64) v1(38.97,26.79) v1(38.97,24.93) v1(38.97,23.93) v1(38.97,22.93) v1(38.97,21.93) v1(38.97,20.93) v1(38.97,19.93) v1(38.97,18.93) v1(38.97,17.93) v1(38.97,16.93) v1(38.97,15.93) v1(39.12,57.91) v1(39.06,38.64) v1(39.12,13.72) v1(39.12,11.68) v1(39.37,76.71) v1(39.55,48.32) v1(39.98,54.82) v1(40.55,48.35) v1(40.89,8.64) v1(40.94,7.46) v1(40.94,6.46) v1(40.94,5.46) v1(40.96,54.63) v1(41.08,28.76) v1(41.08,24.76) v1(41.08,20.76) v1(41.08,16.76) v1(41.15,4.32) v1(41.42,50.87) v1(41.38,48.91) v1(41.46,52.84) v1(41.57,53.84) v1(41.59,51.85) v1(41.6,49.88) v1(41.91,87.38) v1(42.04,1.59) v1(42.16,74.17) v1(42.16,8.64) v1(42.42,4.32) v1(42.8,97.6) v1(43.43,8.64) v1(43.62,56.45) v1(43.62,52.45) v1(43.56,14.67) v1(43.56,10.67) v1(43.69,47.75) v1(43.94,4.32) v1(44.7,8.64) v1(45.15,71.44) v1(45.15,67.44) v1(45.47,7.37) v1(45.47,6.1) v1(45.47,4.83) v1(45.72,87.38) v1(45.72,82.3) v1(45.72,77.47) v1(45.66,28.76) v1(45.66,24.76) v1(45.66,20.76) v1(45.66,16.76) v1(46.04,1.59) v1(46.8,97.6) v1(47.18,56.45) v1(47.18,52.45) v1(47.24,47.75) v1(47.18,43.81) v1(49.53,87.12) v1(49.78,78.49) v1(49.78,1.59) v1(50.04,74.17) v1(50.55,47.75) v1(50.55,43.94) v1(50.74,56.45) v1(50.74,52.45) v1(50.74,40.77) v1(50.74,36.77) v1(50.74,32.77) v1(50.74,28.76) v1(50.74,24.76) v1(50.74,20.76) v1(50.74,16.76) v1(51.31,97.6) v1(51.56,12.45) v1(52.07,8.64) v1(52.07,4.06) v1(52.77,58.99) v1(52.77,54.99) v1(53.34,87.12) v1(53.34,82.55) v1(53.34,79.5) v1(53.41,19.64) v1(53.41,18.64) v1(53.41,17.64) v1(53.41,16.64) v1(53.41,15.64) v1(53.41,14.64) v1(53.41,13.64) v1(53.63,20.62) v1(53.59,8.64) v1(53.59,4.06) v1(53.85,70.36) v1(53.78,1.59) v1(54.1,76.71) v1(54.1,12.92) v1(54.33,21.33) v1(54.36,10.67) v1(54.86,41.66) v1(54.86,39.62) v1(55.04,22.03) v1(55.1,12.87) v1(55.12,8.64) v1(55.15,19.54) v1(55.15,18.54) v1(55.15,17.54) v1(55.15,16.54) v1(55.31,97.6) v1(55.31,32.77) v1(55.31,28.76) v1(55.37,4.06) v1(55.75,22.74) v1(55.67,7.46) v1(55.67,6.46) v1(55.67,5.46) v1(55.79,20.32) v1(56.1,12.87) v1(56.45,23.45) v1(56.5,21.02) v1(56.64,74.68) v1(56.64,41.66) v1(56.64,39.62) v1(56.68,52.51) v1(56.67,50.55) v1(56.87,51.52) v1(56.91,49.57) v1(57.15,16) v1(57.15,14.73) v1(57.1,12.79) v1(57.22,53.35) v1(57.16,24.16) v1(57.2,21.73) v1(57.34,84.01) v1(57.34,80.01) v1(57.4,42.67) v1(57.4,11.68) v1(57.55,17.92) v1(57.55,16.92) v1(57.75,49.03) v1(57.66,18.91) v1(57.78,1.59) v1(57.91,38.35) v1(57.87,24.86) v1(57.91,22.44) v1(58.18,53.61) v1(58.29,9.84) v1(58.29,5.84) v1(58.42,87.63) v1(58.37,19.62) v1(58.58,25.57) v1(58.62,23.14) v1(58.67,63.5) v1(58.67,61.98) v1(58.75,49) v1(58.93,38.35) v1(59.07,20.33) v1(59.18,53.61) v1(59.31,97.6) v1(59.28,26.28) v1(59.32,23.85) v1(59.3,18.08) v1(59.29,17.08) v1(59.29,16.08) v1(59.44,13.72) v1(59.44,11.68) v1(59.75,49) v1(59.78,21.03) v1(59.99,37.98) v1(59.99,36.98) v1(59.99,35.98) v1(59.99,34.98) v1(59.99,33.98) v1(59.99,32.98) v1(59.99,31.98) v1(59.99,30.98) v1(59.99,29.98) v1(59.99,28.98) v1(59.99,27.98) v1(59.99,26.98) v1(60.03,24.56) v1(60,18.79) v1(60.09,54.02) v1(60.09,48.07) v1(60.09,47.07) v1(60.09,46.07) v1(60.09,45.07) v1(60.09,44.07) v1(60.18,55.01) v1(60.2,42.93) v1(60.49,21.74) v1(60.74,25.26) v1(60.71,19.5) v1(60.89,55.72) v1(61.19,22.45) v1(61.34,84.01) v1(61.34,80.01) v1(61.45,25.97) v1(61.42,20.2) v1(61.47,76.96) v1(61.47,71.12) v1(61.59,56.43) v1(61.68,51.95) v1(61.72,49.96) v1(61.74,37.93) v1(61.74,36.93) v1(61.74,35.93) v1(61.74,34.93) v1(61.74,33.93) v1(61.74,32.93) v1(61.74,31.93) v1(61.74,30.93) v1(61.74,29.93) v1(61.74,28.93) v1(61.74,27.93) v1(61.74,26.93) v1(61.84,53.94) v1(61.81,52.94) v1(61.8,50.96) v1(61.84,48.97) v1(61.84,47.97) v1(61.84,46.97) v1(61.84,45.97) v1(61.78,1.59) v1(61.9,23.16) v1(61.98,38.86) v1(62.13,20.91) v1(62.3,57.13) v1(62.4,54.77) v1(62.48,8.89) v1(62.61,23.86) v1(62.83,21.62) v1(63.01,57.84) v1(63.11,55.47) v1(63.25,73.41) v1(63.21,33.67) v1(63.21,31.82) v1(63.31,97.6) v1(63.32,24.57) v1(63.5,86.87) v1(63.54,22.33) v1(63.55,34.61) v1(63.58,32.74) v1(63.58,30.89) v1(63.71,58.55) v1(63.82,56.18) v1(64.02,25.28) v1(64.01,8.89) v1(64.25,23.03) v1(64.42,59.25) v1(64.44,35.06) v1(64.52,56.89) v1(64.49,30.47) v1(64.73,25.98) v1(64.84,42.72) v1(64.84,41.72) v1(64.84,40.72) v1(64.84,39.72) v1(65.02,76.96) v1(64.95,23.74) v1(65.13,59.96) v1(65.22,61.96) v1(65.22,60.96) v1(65.17,57.48) v1(65.17,56.48) v1(65.17,55.48) v1(65.17,54.48) v1(65.17,53.48) v1(65.17,52.48) v1(65.17,51.48) v1(65.23,49.48) v1(65.21,47.5) v1(65.17,46.5) v1(65.17,45.5) v1(65.17,44.5) v1(65.17,43.5) v1(65.28,50.48) v1(65.33,48.49) v1(65.26,36.64) v1(65.26,35.64) v1(65.26,29.83) v1(65.26,28.83) v1(65.26,27.83) v1(65.26,26.83) v1(65.28,20.57) v1(65.28,17.53) v1(65.28,8.89) v1(65.53,6.86) v1(65.53,5.08) v1(65.66,24.45) v1(65.81,58.25) v1(66.29,87.38) v1(66.29,84.07) v1(66.29,1.59) v1(66.37,25.15) v1(66.55,66.04) v1(66.51,58.96) v1(66.61,33.72) v1(66.72,59.94) v1(66.66,31.86) v1(66.92,56.41) v1(66.92,55.41) v1(66.92,54.41) v1(66.92,53.41) v1(66.92,52.41) v1(66.92,51.41) v1(66.92,45.99) v1(67.01,36.64) v1(67.01,35.64) v1(67.01,34.64) v1(67.01,32.8) v1(67.01,30.92) v1(67.01,29.92) v1(67.01,28.92) v1(67.01,27.92) v1(67.01,26.92) v1(67.01,25.92) v1(67.34,57.32) v1(67.49,46.81) v1(67.56,66.04) v1(67.69,97.6) v1(67.92,51.41) v1(68.05,58.03) v1(68.49,46.81) v1(68.58,76.96) v1(68.58,68.07) v1(68.58,67.06) v1(68.58,65.02) v1(68.58,64.01) v1(68.58,38.35) v1(68.58,20.57) v1(68.58,17.53) v1(68.7,58.94) v1(68.7,57.94) v1(68.91,56.96) v1(68.92,51.39) v1(69.46,47.07) v1(69.6,66.04) v1(69.62,56.25) v1(69.6,38.35) v1(69.85,87.38) v1(69.85,84.07) v1(69.85,80.01) v1(69.76,50.84) v1(69.79,48.89) v1(69.85,42.67) v1(70,49.87) v1(69.99,47.91) v1(70.1,41.4) v1(70.1,39.88) v1(70.32,55.55) v1(70.29,1.59) v1(70.44,59.94) v1(70.44,58.94) v1(70.44,57.94) v1(70.61,66.04) v1(70.87,11.68) v1(71.03,54.84) v1(71.13,57.21) v1(71.28,58.29) v1(71.63,7.62) v1(71.63,5.84) v1(71.69,97.6) v1(71.74,54.13) v1(71.84,56.5) v1(71.88,4.57) v1(71.97,61.93) v1(71.97,60.93) v1(71.99,57.58) v1(72.1,59.94) v1(72.14,41.4) v1(72.14,39.88) v1(72.21,51.44) v1(72.44,53.42) v1(72.37,52.43) v1(72.39,8.64) v1(72.54,55.8) v1(72.7,56.88) v1(72.81,59.23) v1(72.77,50.61) v1(73.02,99.12) v1(73.22,21.11) v1(73.22,20.11) v1(73.22,19.11) v1(73.22,18.11) v1(73.22,17.11) v1(73.22,16.11) v1(73.22,15.11) v1(73.25,55.09) v1(73.41,80.01) v1(73.41,76.96) v1(73.41,56.17) v1(73.41,22.09) v1(73.52,58.53) v1(73.58,50.02) v1(73.6,46.16) v1(73.6,42.16) v1(73.6,37.78) v1(73.6,33.46) v1(73.6,29.46) v1(73.65,14.21) v1(73.91,8.64) v1(73.96,54.38) v1(74.11,55.46) v1(74.12,22.8) v1(74.22,57.82) v1(74.19,49.23) v1(74.17,10.67) v1(74.29,1.59) v1(74.36,13.51) v1(74.62,53.64) v1(74.82,54.76) v1(74.83,23.51) v1(74.93,57.11) v1(74.95,48.58) v1(74.96,20.94) v1(74.96,19.94) v1(74.96,18.94) v1(74.96,17.94) v1(74.96,16.94) v1(74.96,15.94) v1(75.07,12.8) v1(75.18,8.64) v1(75.29,52.89) v1(75.44,4.57) v1(75.53,24.22) v1(75.55,21.76) v1(75.64,56.41) v1(75.61,54.14) v1(75.62,47.83) v1(75.69,62.23) v1(75.69,59.18) v1(75.78,12.09) v1(76.02,52.2) v1(76,7.46) v1(76,6.46) v1(76,5.46) v1(76.14,46.16) v1(76.14,42.16) v1(76.14,37.78) v1(76.24,24.92) v1(76.26,53.38) v1(76.25,22.47) v1(76.45,71.37) v1(76.64,56.48) v1(76.61,47.75) v1(76.73,51.51) v1(76.74,13.6) v1(76.74,11.83) v1(76.95,25.63) v1(77.02,99.12) v1(76.96,76.96) v1(77.05,52.77) v1(76.96,23.17) v1(77.4,50.76) v1(77.42,48.33) v1(77.62,56.64) v1(77.64,51.97) v1(77.6,33.46) v1(77.6,29.46) v1(77.72,41.66) v1(77.72,39.62) v1(77.66,26.34) v1(77.67,23.88) v1(77.74,13.57) v1(77.74,11.83) v1(77.87,17.33) v1(77.87,16.33) v1(78.23,68.83) v1(78.16,50.11) v1(78.18,47.68) v1(78.33,51.24) v1(78.32,18.22) v1(78.29,1.59) v1(78.45,56.08) v1(78.36,27.04) v1(78.37,24.59) v1(78.49,62.23) v1(78.49,59.18) v1(78.61,10.1) v1(78.61,6.1) v1(78.9,49.44) v1(78.89,46.98) v1(79.05,55.27) v1(79.04,50.53) v1(79.03,18.92) v1(79.07,27.75) v1(79.08,25.29) v1(79.44,52.84) v1(79.61,48.73) v1(79.6,46.27) v1(79.61,16.84) v1(79.61,15.84) v1(79.75,49.83) v1(79.74,19.63) v1(79.84,54.66) v1(79.76,41.66) v1(79.76,39.62) v1(79.78,28.46) v1(79.79,26) v1(79.76,13.97) v1(79.76,11.43) v1(79.99,53.67) v1(80.02,52.02) v1(80.21,17.64) v1(80.26,80.01) v1(80.26,76.96) v1(80.32,48.02) v1(80.31,45.56) v1(80.44,20.34) v1(80.46,49.12) v1(80.52,42.67) v1(80.48,29.17) v1(80.5,26.71) v1(80.73,51.32) v1(80.77,38.35) v1(80.92,18.34) v1(81.02,47.32) v1(81.01,44.86) v1(81.16,48.41) v1(81.19,29.87) v1(81.2,27.42) v1(81.15,21.04) v1(81.28,42.67) v1(81.44,50.61) v1(81.63,19.05) v1(81.73,46.61) v1(81.72,44.15) v1(81.79,38.35) v1(81.87,47.71) v1(81.9,30.58) v1(81.91,28.12) v1(81.86,21.75) v1(82.14,49.9) v1(82.33,19.76) v1(82.44,45.9) v1(82.43,43.44) v1(82.58,47) v1(82.61,31.29) v1(82.62,28.83) v1(82.57,22.46) v1(82.68,1.59) v1(82.8,8.64) v1(82.85,49.19) v1(82.85,38.26) v1(82.85,37.26) v1(82.85,36.26) v1(82.85,35.26) v1(82.85,34.26) v1(82.85,33.26) v1(82.85,32.26) v1(83.04,20.47) v1(83.14,45.2) v1(83.28,46.29) v1(83.32,29.54) v1(83.27,23.17) v1(83.57,80.01) v1(83.57,76.96) v1(83.56,48.49) v1(83.75,21.17) v1(83.85,44.49) v1(84.01,45.61) v1(84.03,30.24) v1(83.98,23.87) v1(84.27,47.78) v1(84.33,8.64) v1(84.46,21.88) v1(84.6,38.07) v1(84.6,37.07) v1(84.6,36.07) v1(84.6,35.07) v1(84.6,34.07) v1(84.6,33.07) v1(84.6,32.07) v1(84.6,31.07) v1(84.69,24.58) v1(85.09,53.09) v1(85.09,50.04) v1(85.17,47.35) v1(85.16,22.59) v1(85.39,25.29) v1(85.87,23.29) v1(85.85,7.11) v1(85.85,5.33) v1(86.1,25.99) v1(86.17,47.35) v1(86.5,34.29) v1(86.61,80.01) v1(86.61,76.96) v1(86.58,24) v1(86.69,35.27) v1(86.68,1.59) v1(86.81,26.7) v1(87.04,33.45) v1(87.12,98.3) v1(87.12,97.03) v1(87.12,95.76) v1(87.17,47.35) v1(87.28,24.71) v1(87.31,22.8) v1(87.31,18.8) v1(87.5,35.86) v1(87.52,27.41) v1(87.63,44.49) v1(87.63,42.42) v1(87.63,41.15) v1(87.63,39.62) v1(87.88,53.09) v1(87.88,50.04) v1(87.91,46.68) v1(88.03,43.57) v1(88.01,33.2) v1(87.99,25.42) v1(88.12,38.64) v1(88.12,37.64) v1(88.12,36.64) v1(88.12,32.2) v1(88.12,31.2) v1(88.12,30.2) v1(88.12,29.2) v1(88.12,28.2) v1(88.39,98.3) v1(88.39,97.03) v1(88.39,95.76) v1(88.61,45.97) v1(88.7,26.12) v1(89.09,71.94) v1(89.09,67.94) v1(89.32,45.26) v1(89.41,26.83) v1(89.59,34.68) v1(89.66,98.3) v1(89.66,97.03) v1(89.66,95.76) v1(89.66,80.01) v1(89.66,76.96) v1(89.85,61.28) v1(89.85,57.28) v1(89.87,38.64) v1(89.87,37.64) v1(89.87,36.64) v1(89.87,35.64) v1(89.86,33.72) v1(89.87,32.72) v1(89.87,31.72) v1(89.87,30.72) v1(89.87,29.72) v1(89.87,28.72) v1(89.87,27.72) v1(90.68,47.75) v1(91.19,38.61) v1(91.31,22.8) v1(91.31,18.8) v1(91.95,29.97) v1(91.95,26.92) v1(92.2,38.61) v1(92.71,52.58) v1(92.96,39.62) v1(93.98,46.48) v1(94.17,13.14) v1(94.17,9.14) v1(94.74,41.91) v1(94.74,39.62) v1(95.25,50.04) v1(96.01,33.78) v1(96.01,30.73) v1(96.01,27.69) v1(96.01,24.64) v1(96.01,21.84) v1(96.01,18.8) v1(96.52,43.18) v1(96.52,39.37) v1(98.17,13.14) v1(98.17,9.14) v1(99.25,72.71) v1(99.25,68.71) v1(99.25,65.09) v1(99.25,61.09) v1(99.25,56.96) v1(99.25,52.96) v1(99.25,48.58) v1(99.25,44.58) v1(99.25,40.96) v1(99.25,36.96) v1(99.25,32.83) v1(99.25,28.83) v1(99.25,25.02) v1(99.25,20.89) v1(99.25,16.89)
